# Altium PCB PCB1.PcbDoc (part 1 of 7)
Units mm, origin at the board's own origin, x right, y up, seen from the top; angles counter-clockwise.
Board outline 168 x 107.92 mm, 4 copper layers (Top Layer, POWER_LAYER, GND_LAYER, Bottom Layer), stack 1.182 mm thick; 507 components, 566 nets, 2495 pads, 1244 vias.
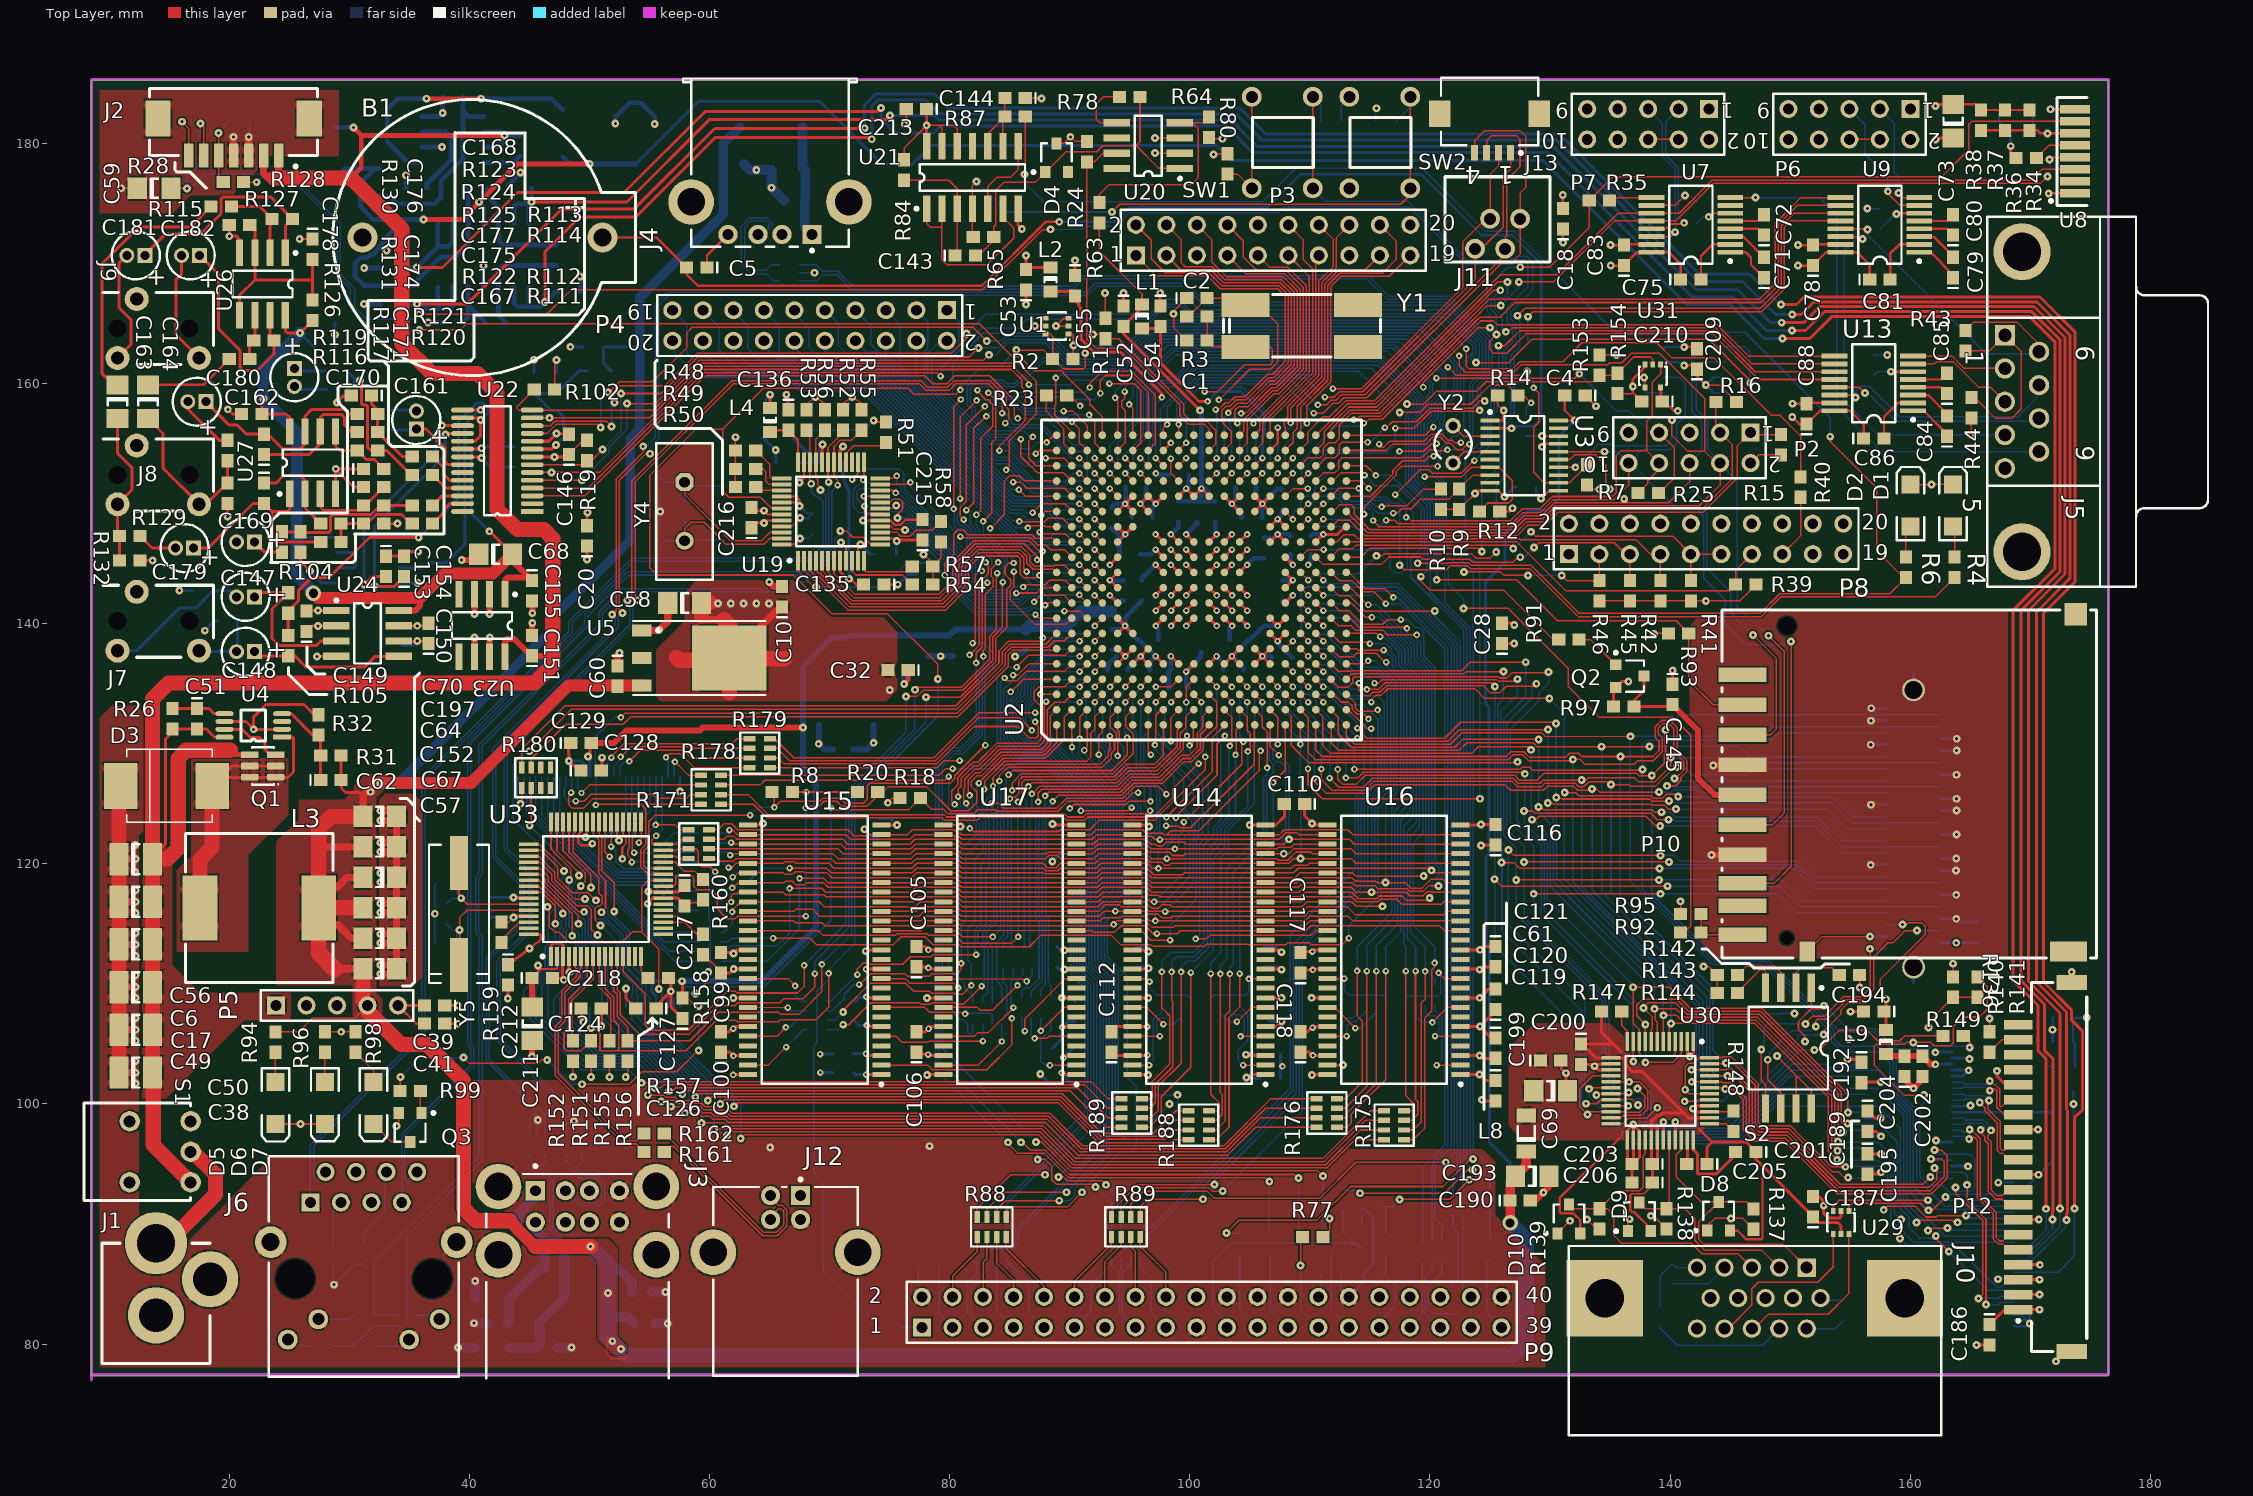
[diagram p0: Top Layer view]
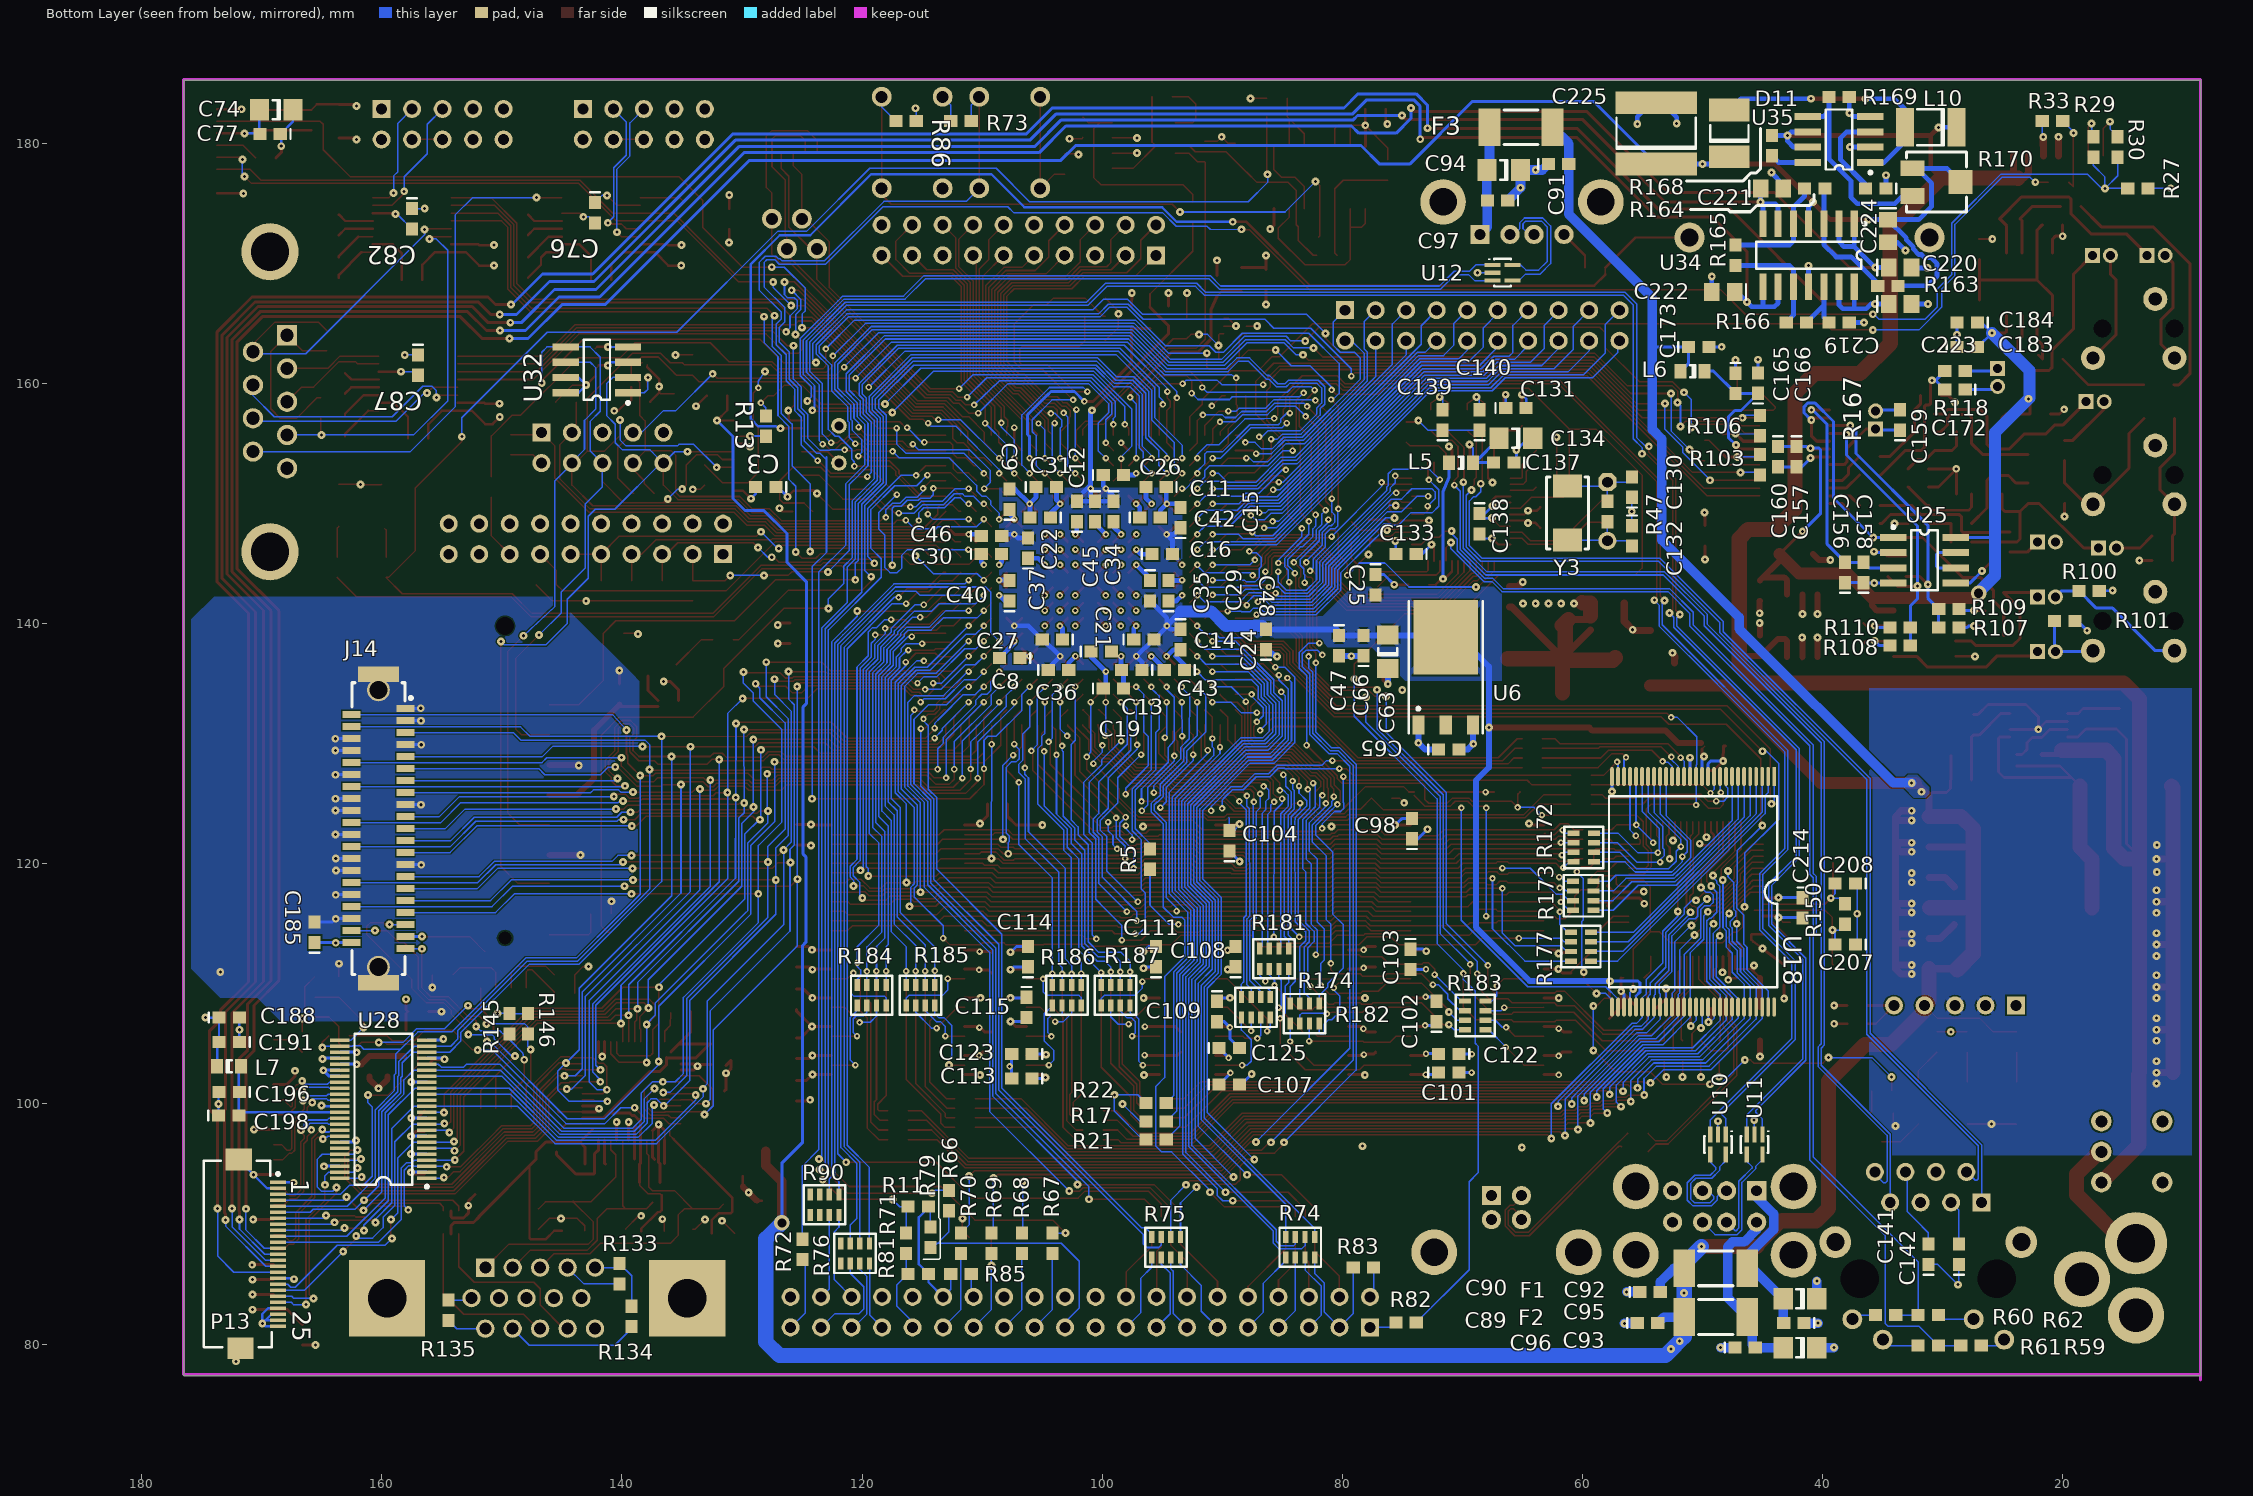
[diagram p1: Bottom Layer view, seen from below]
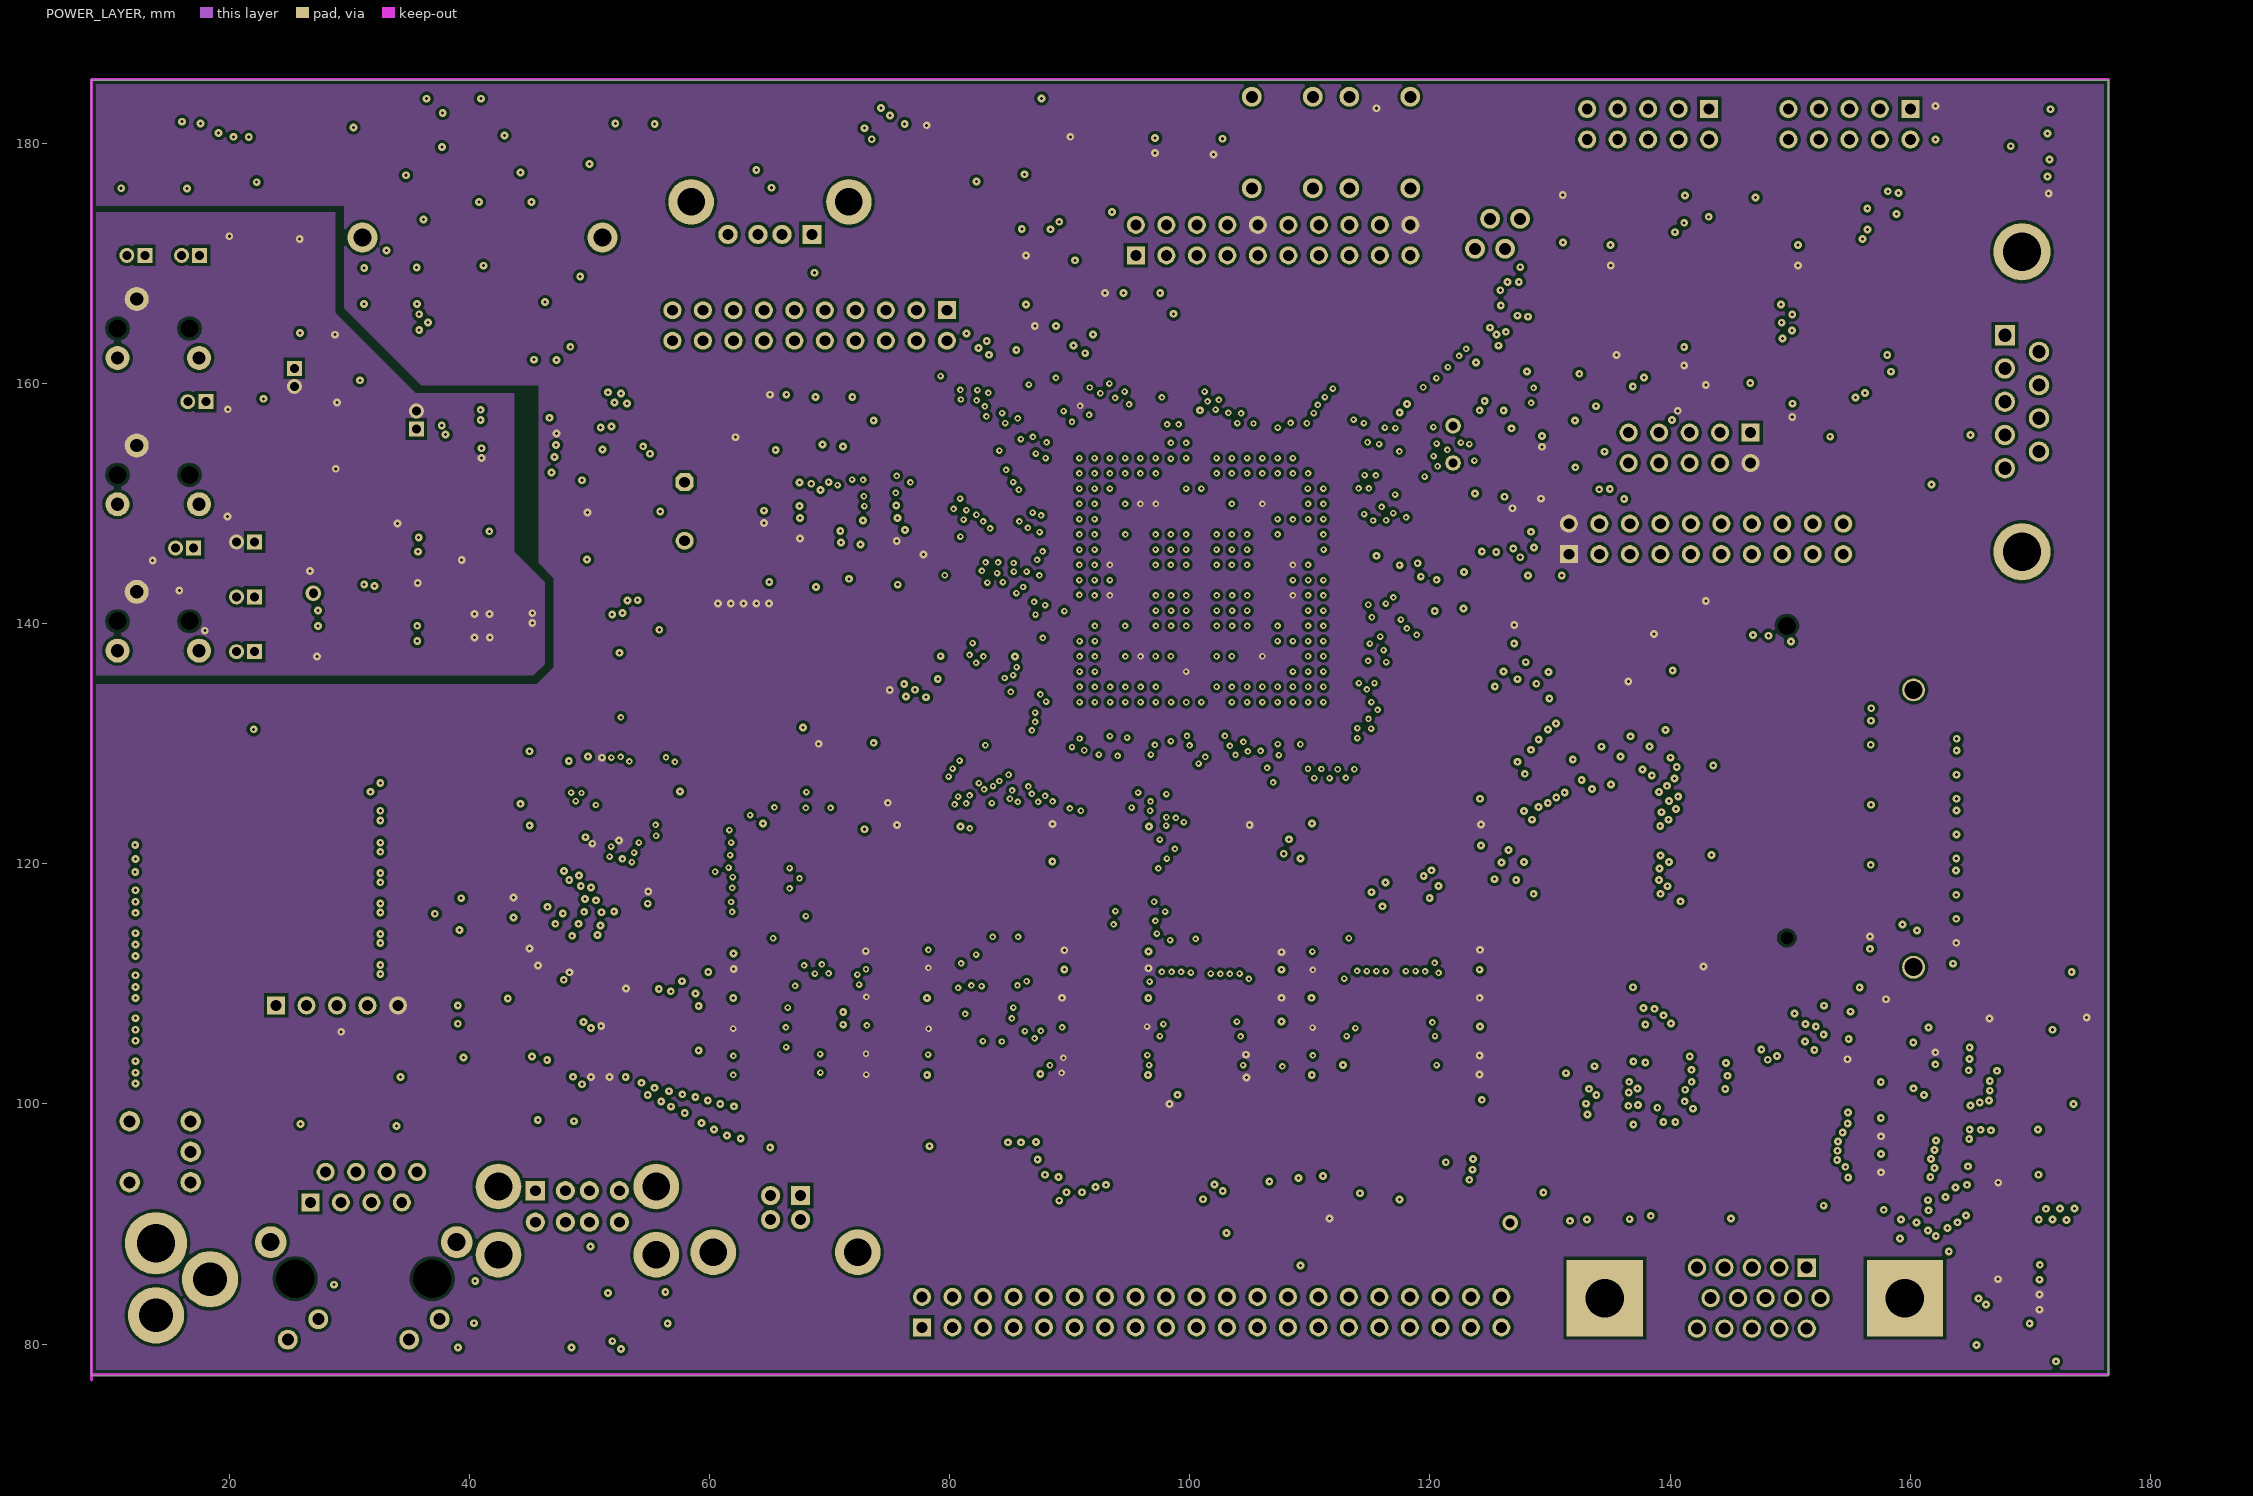
[diagram p2: POWER_LAYER]
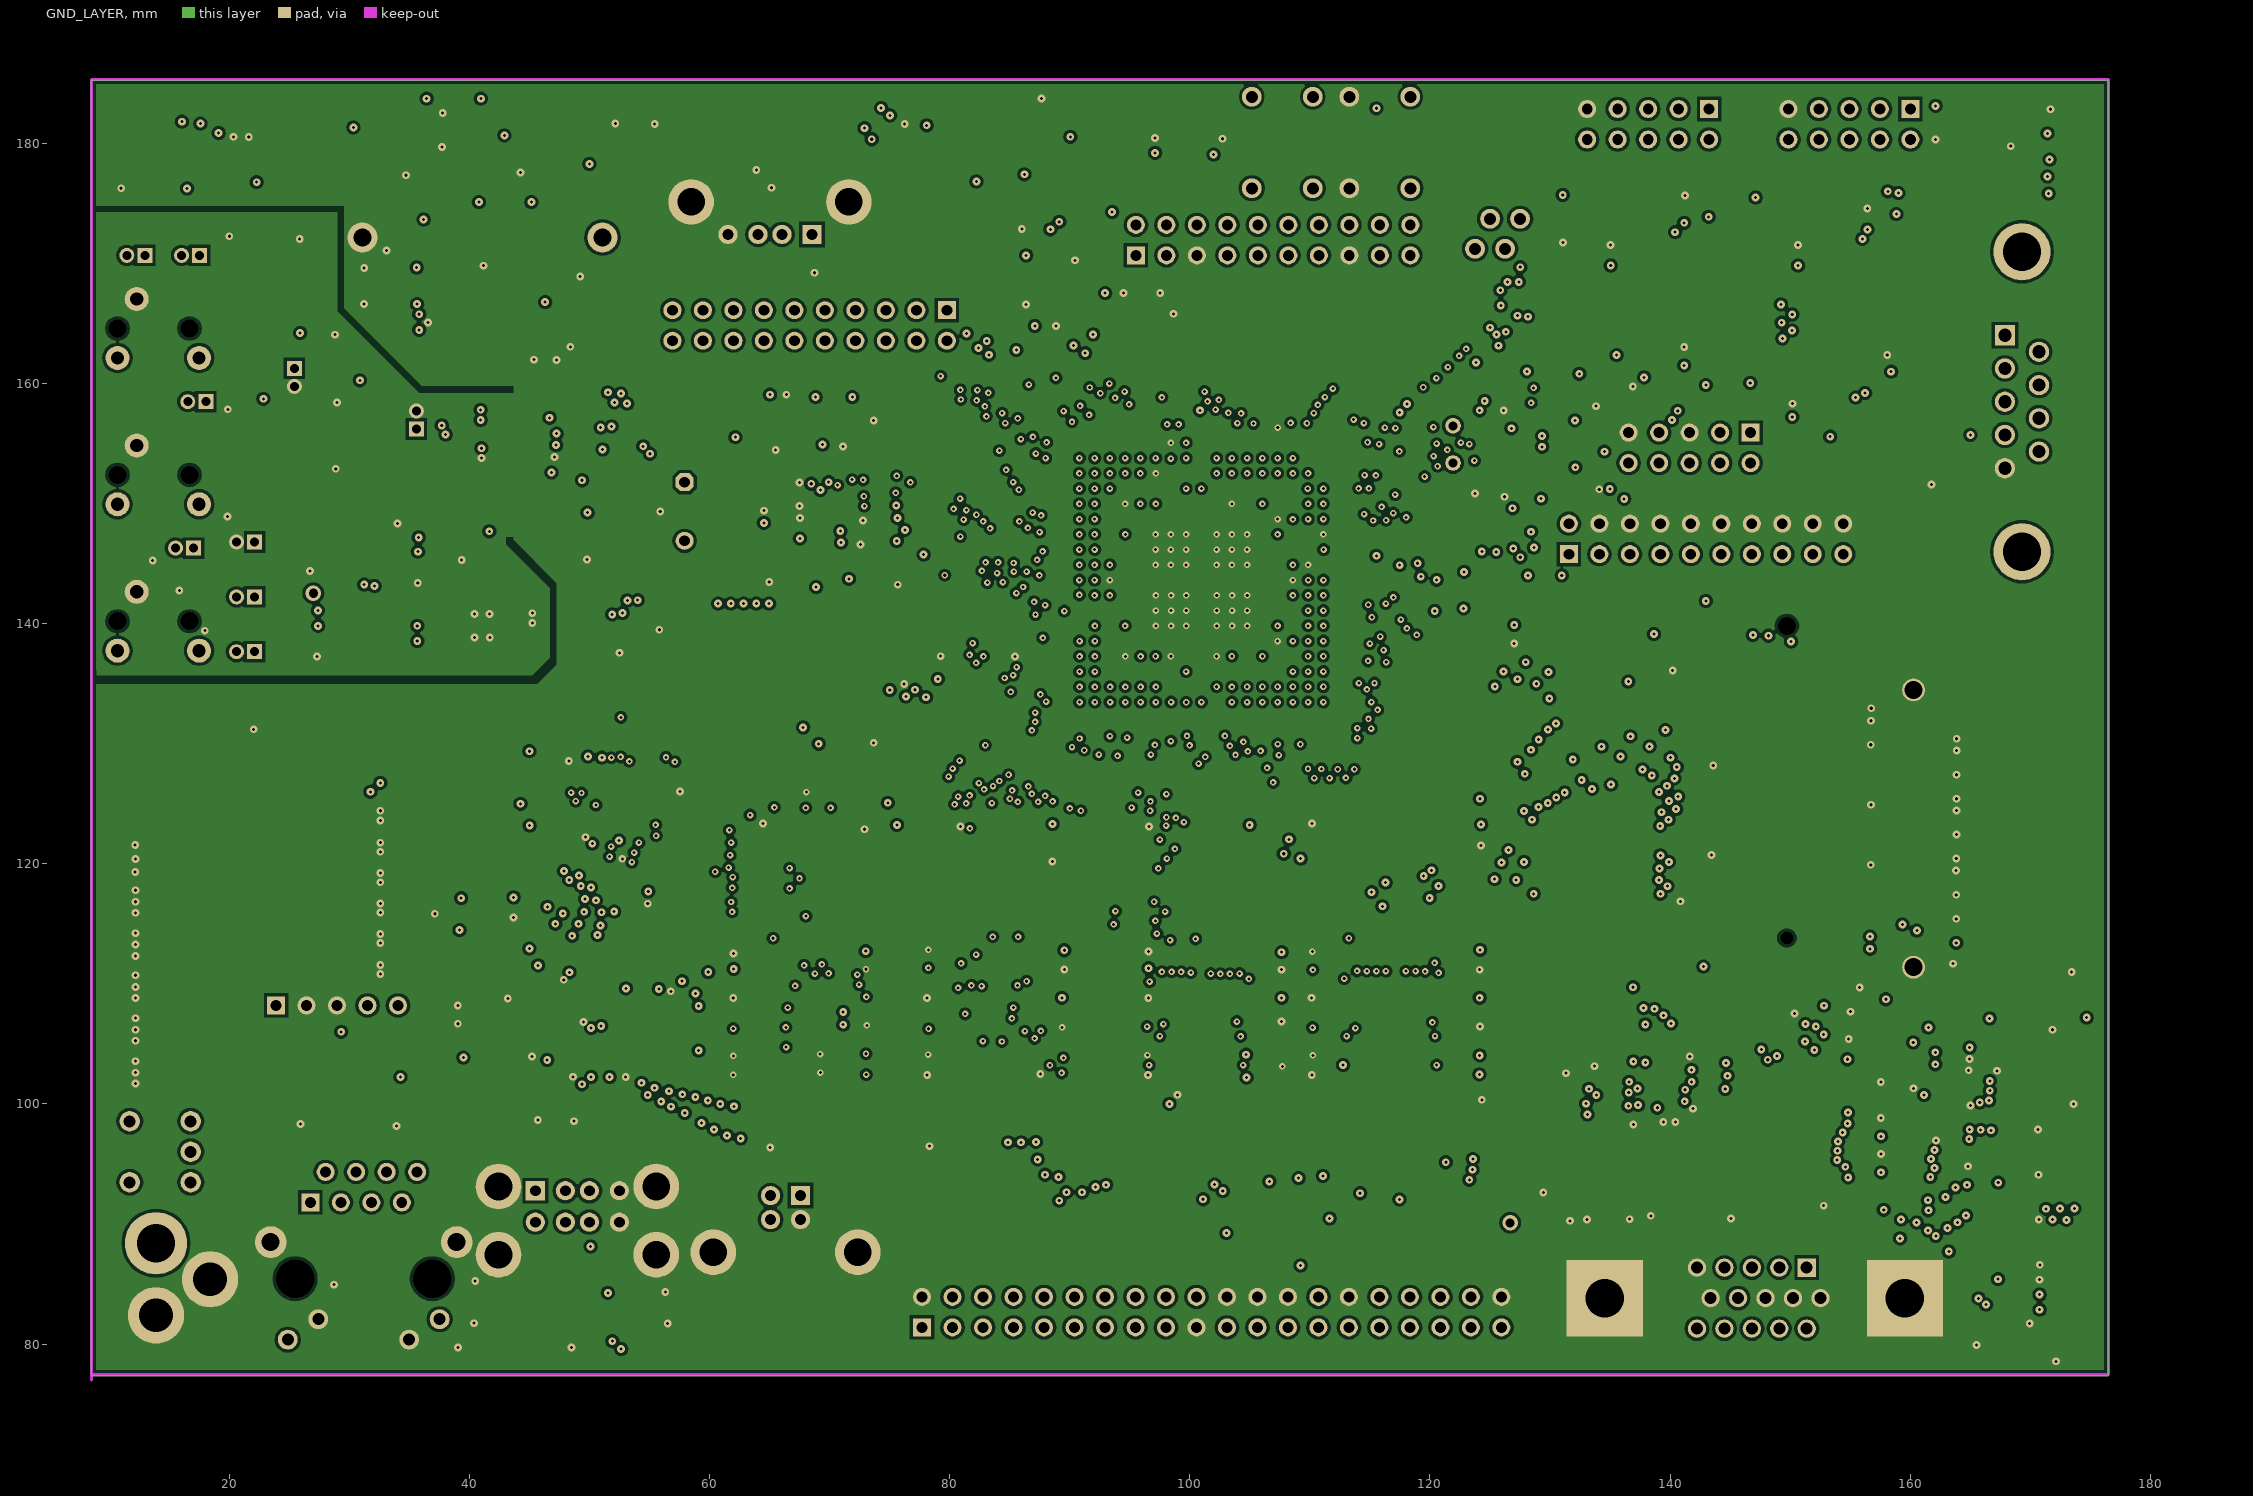
[diagram p3: GND_LAYER]

## Layer stack, top to bottom
Top Layer: signal copper 0.0356
Dielectric: core 0.4, FR-4, Dk 4.8
POWER_LAYER: signal copper 0.0356
Dielectric: prepreg 0.32, FR-4, Dk 4.8
GND_LAYER: signal copper 0.0356
Dielectric: core 0.32, FR-4, Dk 4.8
Bottom Layer: signal copper 0.0356

## Board outline
8.5,185.28 176.5,185.28 176.5,77.36 8.5,77.36

## Design rules (kind name [scope] priority, off if disabled: settings)
Clearance Clearance_POWER [OnLayer('POWER_LAYER')] p1: gap=0.254
Clearance Clearance_GND [OnLayer('GND_LAYER')] p2: gap=0.254
Clearance Clearance_BOTTOM [OnLayer('Bottom Layer')] p3: gap=0.127
Clearance Clearance_TOP [OnLayer('Top Layer')] p4: gap=0.127
ComponentClearance [All] p1: gap=0.254 collisioncheckmode=1 verticalgap=0.254
FanoutControl Fanout_BGA [IsBGA] p1: bgadir=Out bgaviamode=Centered fanoutstyle=BGA fanoutdirection=Alternating viagrid=0.025 // Fanout_BGA (Default Rule)
HoleSize [All] p1: absolutevalues=TRUE maxlimit=5.08 minlimit=0.254 maxpercent=80.000 minpercent=20.000
PlaneClearance [All] p1 off: clearance=0.254
PlaneConnect [All] p1 off: planeconnectstyle=Direct reliefexpansion=0.508 reliefentries=4 reliefconductorwidth=0.254 reliefairgap=0.254
PolygonConnect PolygonConnect_1 [All] p1 off: connectstyle=Relief reliefconductorwidth=0.4 reliefentries=4 polygonreliefangle="45 Angle"
PolygonConnect [InNet('GND') or InNet('VCCIO') or InNet('VCCCORE')] p2: connectstyle=Direct reliefconductorwidth=0.254 reliefentries=4 polygonreliefangle="45 Angle"
PolygonConnect PolygonConnect_top [OnLayer('Top Layer')] p3: connectstyle=Relief reliefconductorwidth=0.4 reliefentries=4 polygonreliefangle="45 Angle"
PolygonConnect PolygonConnect_GND [OnLayer('GND_LAYER')] p4: connectstyle=Direct reliefconductorwidth=0.254 reliefentries=4 polygonreliefangle="90 Angle"
PolygonConnect PolygonConnect_POWER [OnLayer('POWER_LAYER')] p5: connectstyle=Direct reliefconductorwidth=0.254 reliefentries=4 polygonreliefangle="90 Angle"
PolygonConnect PolygonConnect_bottom [OnLayer('Bottom Layer')] p6: connectstyle=Relief reliefconductorwidth=0.4 reliefentries=4 polygonreliefangle="45 Angle"
RoomDefinition Sheet1 [InComponentClass('Sheet1')] p1 off: confinementstyle=ConfineIn formatcopy=TRUE lockcomponents=FALSE outline 394.3,34.04 626.06,34.04 626.06,63.76 394.3,63.76
RoomDefinition Sheet2 [InComponentClass('Sheet2')] p2 off: confinementstyle=ConfineIn formatcopy=TRUE lockcomponents=FALSE outline 106.98,306.94 138.02,306.94 138.02,377.81 106.98,377.81
RoomDefinition Sheet3 [InComponentClass('Sheet3')] p3 off: confinementstyle=ConfineIn formatcopy=TRUE lockcomponents=FALSE outline 295.94,95.9 804.209,95.9 804.209,113.61 295.94,113.61
RoomDefinition Sheet4 [InComponentClass('Sheet4')] p4 off: confinementstyle=ConfineIn formatcopy=TRUE lockcomponents=FALSE outline 279.06,34.95 645.709,34.95 645.709,68.76 279.06,68.76
RoomDefinition Sheet5 [InComponentClass('Sheet5')] p5 off: confinementstyle=ConfineIn formatcopy=TRUE lockcomponents=FALSE outline 292.221,55.36 584.1,55.36 584.1,80.86 292.221,80.86
RoomDefinition Sheet6 [InComponentClass('Sheet6')] p6 off: confinementstyle=ConfineIn formatcopy=TRUE lockcomponents=FALSE outline 286.53,42.6 520.58,42.6 520.58,63.98 286.53,63.98
RoomDefinition Sheet7 [InComponentClass('Sheet7')] p7 off: confinementstyle=ConfineIn formatcopy=TRUE lockcomponents=FALSE outline 221.96,473.72 556.679,473.72 556.679,531.89 221.96,531.89
RoomDefinition Sheet8 [InComponentClass('Sheet8')] p8 off: confinementstyle=ConfineIn formatcopy=TRUE lockcomponents=FALSE outline 177.4,371.4 755.089,371.4 755.089,383.67 177.4,383.67
RoomDefinition Sheet9 [InComponentClass('Sheet9')] p9 off: confinementstyle=ConfineIn formatcopy=TRUE lockcomponents=FALSE outline 478.061,468.82 861.2,468.82 861.2,503.82 478.061,503.82
RoomDefinition Sheet10 [InComponentClass('Sheet10')] p10 off: confinementstyle=ConfineIn formatcopy=TRUE lockcomponents=FALSE outline 232.43,411.58 459.46,411.58 459.46,430.42 232.43,430.42
RoomDefinition Sheet11 [InComponentClass('Sheet11')] p11 off: confinementstyle=ConfineIn formatcopy=TRUE lockcomponents=FALSE outline 177.9,402.81 338.53,402.81 338.53,423.36 177.9,423.36
RoutingLayers [All] p1: top layer_v5=TRUE mid layer 1_v5=FALSE mid layer 2_v5=FALSE bottom layer_v5=TRUE
RoutingVias [All] p1: holewidth=0.254 width=0.65 viastyle="Through Hole" minholewidth=0.25 minwidth=0.54 maxholewidth=0.8 maxwidth=1.5
SolderMaskExpansion [All] p1: expansion=0.075
TestPointUsage [All] p1: valid=0 allowmultiple=FALSE
Testpoint [All] p1: side=15 testpointundercomponent=TRUE minsize=1.016 maxsize=2.54 preferedsize=1.524 minholesize=0 maxholesize=1.016 preferedholesize=0.813 testpointgrid=0.025 style=1023 order=0123456789
Width [All] p1: maxlimit=1.27 minlimit=0.12 preferedwidth=0.127 toplayer_minwidth=0.12 midlayer1_minwidth=0.2 midlayer1_prefwidth=0.25 midlayer2_minwidth=0.2 midlayer2_prefwidth=0.25 bottomlayer_minwidth=0.12 minimp=50.000000 maximp=50.000000 favimp=50.000000
12 further rules are at their usual default settings.

## Classes and differential pairs
component class Sheet1: B1 C1 C2 C3 C4 C5 D1 D2 R1 R2 R3 R4 R5 R6 R7 R8 R9 R10 R11 R12 R13 R14 R15 R16 R17 R18 R19 R20 R21 R22 R23 R24 R171 R172 R173 R177 R178 R179 R180 U1 U2 U3 Y1 Y2
component class Sheet2: P2 P3 P4 R25
component class Sheet3: C6 C8 C9 C10 C11 C12 C13 C14 C15 C16 C17 C18 C19 C20 C21 C22 C24 C25 C26 C27 C28 C29 C30 C31 C32 C34 C35 C36 C37 C38 C39 C40 C41 C42 C43 C45 C46 C47 C48 C49 C50 C51 C52 C53 C54 C55 C56 C57 C58 C59 C60 C61 C62 C63 C64 C65 C66 C67 C70 C152 C197 D3 J1 J2 L1 L2 L3 P5 Q1 R26 R27 R28 R29 R30 R31 R32 R33 S1 U4 U5 U6
component class Sheet4: C71 C72 C73 C74 C75 C76 C77 C78 C79 C80 C81 C82 C83 C84 C85 C86 C87 C88 C89 C90 C91 C92 C93 C94 C95 C96 C97 F1 F2 F3 J3 J4 J5 P6 P7 P8 R34 R35 R36 R37 R38 R39 R40 R41 R42 R43 R44 R45 R46 U7 U8 U9 U10 U11 U12 U13
component class Sheet5: C98 C99 C100 C101 C102 C103 C104 C105 C106 C107 C108 C109 C110 C111 C112 C113 C114 C115 C116 C117 C118 C119 C120 C121 C122 C123 C124 C125 C126 C127 C128 C129 R174 R181 R182 R183 R184 R185 R186 R187 U14 U15 U16 U17 U18
component class Sheet6: C130 C131 C132 C133 C134 C135 C136 C137 C138 C139 C140 C141 C142 J6 L4 L5 R47 R48 R49 R50 R51 R52 R53 R54 R55 R56 R57 R58 R59 R60 R61 R62 U19 Y3 Y4
component class Sheet7: C143 C144 C145 D4 D5 D6 D7 P9 P10 Q2 Q3 R63 R64 R65 R66 R67 R68 R69 R70 R71 R72 R73 R74 R75 R76 R77 R78 R79 R80 R81 R82 R83 R84 R85 R86 R87 R88 R89 R90 R91 R92 R93 R94 R95 R96 R97 R98 R99 SW1 SW2 U20 U21
component class Sheet8: C68 C146 C147 C148 C149 C150 C151 C153 C154 C155 C156 C157 C158 C159 C160 C161 C162 C163 C164 C165 C166 C167 C168 C169 C170 C171 C172 C173 C174 C175 C176 C177 C178 C179 C180 C181 C182 C183 C184 J7 J8 J9 L6 R100 R101 R102 R103 R104 R105 R106 R107 R108 R109 R110 R111 R112 R113 R114 R115 R116 R117 R118 R119 R120 R121 R122 R123 R124 R125 R126 R127 R128 R129 R130 R131 R132 U22 U23 U24 U25 U26 U27
component class Sheet9: C69 C185 C186 C187 C188 C189 C190 C191 C192 C193 C194 C195 C196 C198 C199 C200 C201 C202 C203 C204 C205 C206 D8 D9 D10 J10 J11 J14 L7 L8 L9 P12 R133 R134 R135 R136 R137 R138 R139 R140 R141 R142 R143 R144 R145 R146 R147 R148 R149 S2 U28 U29 U30
component class Sheet10: C207 C208 C209 C210 C211 C212 C213 C214 C215 C216 C217 C218 J12 R150 R151 R152 R153 R154 R155 R156 R157 R158 R159 R160 R161 R162 R175 R176 R188 R189 U31 U32 U33 Y5
component class Sheet11: C219 C220 C221 C222 C223 C224 C225 D11 J13 L10 P13 R163 R164 R165 R166 R167 R168 R169 R170 U34 U35

## Components (designator, comment, footprint, x,y, rotation, side; value= is the part's Value field where it differs from the comment)
B1 "CR2032" CR2032 36.068,169.672 r0 top
C1 "33pF" 0603 100.584,163.576 r0 top
C2 "33pF" 0603 100.584,167.132 r0 top
C3 "0.1" 0603 128.016,151.384 r0 bottom
C4 "0.1" 0603 132.08,159.004 r180 top
C5 "NP" 0603 58.928,169.672 r180 top
C6 "10uF 25V" 1210 12.192,116.84 r0 top
C8 "0.1" 0603 107.696,137.16 r0 bottom
C9 "0.1" 0603 107.696,150.368 r90 bottom
C10 "0.1" 0603 66.04,142.24 r90 top
C11 "0.1" 0603 95.504,151.384 r0 bottom
C12 "0.1" 0603 102.108,149.352 r90 bottom
C13 "0.1" 0603 97.536,136.144 r0 bottom
C14 "0.1" 0603 96.52,138.684 r180 bottom
C15 "0.1" 0603 93.472,148.844 r90 bottom
C16 "0.1" 0603 94.996,145.796 r180 bottom
C17 "10uF 25V" 1210 12.192,113.284 r0 top
C18 "0.1" 0603 131.064,173.736 r90 top
C19 "0.1" 0603 99.06,134.62 r180 bottom
C20 "0.1" 0603 49.784,147.32 r90 top
C21 "0.1" 0603 100.076,137.668 r180 bottom
C22 "0.1" 0603 105.156,148.844 r0 bottom
C24 "0.1" 0603 93.472,138.684 r270 bottom
C25 "0.1" 0603 77.216,143.256 r270 bottom
C26 "0.1" 0603 99.06,152.4 r180 bottom
C27 "0.1" 0603 104.14,138.684 r0 bottom
C28 "0.1" 0603 125.984,139.192 r90 top
C29 "0.1" 0603 94.488,142.748 r90 bottom
C30 "0.1" 0603 109.22,145.796 r180 bottom
C31 "0.1" 0603 104.648,151.384 r180 bottom
C32 "0.1" 0603 75.692,136.144 r180 top
C34 "0.1" 0603 99.06,149.352 r270 bottom
C35 "0.1" 0603 96.012,142.748 r270 bottom
C36 "0.1" 0603 103.632,136.144 r180 bottom
C37 "0.1" 0603 106.172,146.304 r90 bottom
C38 "10uF 25V" 1210 12.192,102.616 r0 top
C39 "0.1" 0603 37.084,108.204 r180 top
C40 "0.1" 0603 107.696,142.748 r90 bottom
C41 "0.1" 0603 37.084,106.68 r180 top
C42 "0.1" 0603 96.012,148.844 r180 bottom
C43 "0.1" 0603 93.98,136.144 r0 bottom
C45 "0.1" 0603 100.584,149.352 r270 bottom
C46 "0.1" 0603 109.22,147.32 r180 bottom
C47 "0.1" 0603 80.264,138.176 r270 bottom
C48 "0.1" 0603 86.36,138.684 r90 bottom
C49 "10uF 25V" 1210 12.192,109.728 r0 top
C50 "GRM32RR71H105K" 1210 12.192,106.172 r0 top
C51 "0.01" 0603 17.272,132.08 r270 top
C52 "0.1" 0603 94.488,165.608 r270 top
C53 "0.1" 0603 86.36,168.656 r90 top
C54 "0.1" 0603 97.536,165.608 r270 top
C55 "0.1" 0603 90.424,168.148 r270 top
C56 "10uF 25V" 1210 12.192,120.396 r0 top
C57 "10uF" 1206 32.512,111.252 r180 top
C58 "10uF" 1206 57.912,141.732 r0 top
C59 "10uF" 1206 13.716,176.276 r0 top
C60 "0.1" 0603 52.324,135.636 r270 top
C61 "0.1" 0603 125.476,108.712 r90 top
C62 "6800" 0603 28.448,127 r0 top
C63 "10uF" 1206 76.2,137.668 r90 bottom
C64 "10uF" 1206 32.512,118.872 r180 top
C65 "0.1" 0603 71.12,129.54 r180 bottom
C66 "0.1" 0603 78.232,138.176 r90 bottom
C67 "10uF" 1206 32.512,113.792 r180 top
C68 "10uF" 1206 42.164,145.796 r0 top
C69 "10uF" 1206 130.048,101.092 r180 top
C70 "10uF" 1206 32.512,123.952 r180 top
C71 "0.1" 0603 147.828,169.672 r90 top
C72 "0.1" 0603 147.828,173.228 r90 top
C73 "10uF" 1206 163.576,181.864 r90 top
C74 "10uF" 1206 168.804,182.812 r0 bottom
C75 "0.1" 0603 141.732,168.656 r0 top
C76 "0.1" 0603 142.24,174.244 r270 bottom
C77 "0.1" 0603 169.312,180.78 r0 bottom
C78 "0.1" 0603 151.892,170.688 r90 top
C79 "0.1" 0603 163.576,169.672 r90 top
C80 "0.1" 0603 163.576,173.228 r90 top
C81 "0.1" 0603 157.48,168.656 r0 top
C82 "0.1" 0603 157.48,173.736 r270 bottom
C83 "0.1" 0603 136.144,170.688 r90 top
C84 "0.1" 0603 163.068,156.464 r90 top
C85 "0.1" 0603 163.068,160.02 r90 top
C86 "0.1" 0603 156.972,155.448 r0 top
C87 "0.1" 0603 156.972,161.544 r270 bottom
C88 "0.1" 0603 151.384,157.48 r90 top
C89 "0.1" 0603 54.564,81.732 r180 bottom
C90 "0.1" 0603 54.356,84.328 r180 bottom
C91 "0.1" 0603 61.976,178.308 r180 bottom
C92 "10uF" 1206 41.864,83.764 r0 bottom
C93 "10uF" 1206 41.864,79.7 r0 bottom
C94 "10uF" 1206 66.548,177.8 r0 bottom
C95 "0.1" 0603 42.372,81.732 r0 bottom
C96 "0.1" 0603 46.436,79.7 r180 bottom
C97 "0.1" 0603 67.056,175.26 r0 bottom
C98 "0.1" 0603 74.168,122.936 r90 bottom
C99 "0.1" 0603 60.96,111.76 r90 top
C100 "0.1" 0603 60.96,105.156 r90 top
C101 "0.1" 0603 71.12,102.616 r180 bottom
C102 "0.1" 0603 72.136,107.696 r90 bottom
C103 "0.1" 0603 74.302,112.04 r270 bottom
C104 "0.1" 0603 89.408,121.92 r90 bottom
C105 "0.1" 0603 77.216,112.268 r90 top
C106 "0.1" 0603 77.216,105.156 r90 top
C107 "0.1" 0603 89.408,101.6 r180 bottom
C108 "0.1" 0603 88.9,112.268 r90 bottom
C109 "0.1" 0603 90.424,107.696 r270 bottom
C110 "0.1" 0603 108.712,124.968 r180 top
C111 "0.1" 0603 95.504,112.268 r90 bottom
C112 "0.1" 0603 93.472,105.156 r90 top
C113 "0.1" 0603 106.68,102.108 r0 bottom
C114 "0.1" 0603 106.172,112.268 r90 bottom
C115 "0.1" 0603 106.306,108.04 r270 bottom
C116 "0.1" 0603 125.476,122.428 r90 top
C117 "0.1" 0603 109.22,111.76 r90 top
C118 "0.1" 0603 109.22,105.156 r90 top
C119 "0.1" 0603 125.476,101.092 r270 top
C120 "0.1" 0603 125.476,104.648 r270 top
C121 "0.1" 0603 125.476,112.268 r270 top
C122 "0.1" 0603 71.12,104.14 r0 bottom
C123 "0.1" 0603 106.68,104.14 r0 bottom
C124 "0.1" 0603 50.122,107.969 r0 top
C125 "0.1" 0603 89.408,104.648 r180 bottom
C126 "0.1" 0603 54.694,107.969 r180 top
C127 "0.1" 0603 57.742,107.969 r90 top
C128 "0.1" 0603 50.122,127.781 r0 top
C129 "0.1" 0603 49.276,130.048 r0 top
C130 "33pF" 0603 55.88,151.384 r90 bottom
C131 "0.1" 0603 65.532,157.988 r180 bottom
C132 "33pF" 0603 55.88,147.32 r270 bottom
C133 "0.1" 0603 74.676,145.796 r0 bottom
C134 "10uF" 1206 65.532,155.448 r0 bottom
C135 "0.1" 0603 73.66,143.256 r180 top
C136 "0.1" 0603 66.548,156.972 r270 top
C137 "0.1" 0603 66.548,153.416 r0 bottom
C138 "0.1" 0603 68.58,148.336 r270 bottom
C139 "0.1" 0603 71.628,156.972 r90 bottom
C140 "0.1" 0603 68.58,156.972 r90 bottom
C141 "0.1" 0603 31.18,87.476 r90 bottom
C142 "NP" 0603 28.64,87.476 r90 bottom
C143 "0.1" 0603 81.28,170.688 r0 top
C144 "0.01" 0603 85.444,183.776 r180 top
C145 "1.0" 0603 140.208,134.112 r270 top
C146 "0.1" 0603 48.26,154.94 r90 top
C147 "10uF" CAPPR1.5-4x5 21.336,142.24 r180 top
C148 "10uF" CAPPR1.5-4x5 21.336,137.668 r180 top
C149 "470pF" 0603 26.416,140.208 r90 top
C150 "470pF" 0603 36.576,139.192 r90 top
C151 "0.1" 0603 45.212,138.176 r90 top
C152 "10uF" 1206 32.512,116.332 r180 top
C153 "2700pF" 0603 33.02,144.78 r270 top
C154 "2700pF" 0603 34.544,144.78 r90 top
C155 "0.1" 0603 45.212,142.748 r270 top
C156 "1.0" 0603 38.1,144.272 r90 bottom
C157 "0.1" 0603 42.164,153.924 r270 bottom
C158 "0.1" 0603 36.576,144.272 r90 bottom
C159 "0.1" 0603 33.528,156.972 r90 bottom
C160 "0.1" 0603 43.688,153.924 r270 bottom
C161 "47uF" CAPPR1.5-4x5 35.56,156.972 r90 top
C162 "0.1" 0603 21.844,157.48 r180 top
C163 "10uF" 1206 10.668,158.496 r270 top
C164 "10uF" 1206 13.208,158.496 r270 top
C165 "1.0" 0603 47.244,160.02 r270 bottom
C166 "0.1" 0603 45.364,160.044 r90 bottom
C167 "2200pF" 0603 32.004,148.336 r0 top
C168 "2200pF" 0603 30.988,159.004 r180 top
C169 "22uF" CAPPR1.5-4x5 21.336,146.812 r180 top
C170 "22uF" CAPPR1.5-4x5 25.4,160.528 r270 top
C171 "6800pF" 0603 25.908,146.812 r90 top
C172 "6800pF" 0603 28.956,159.512 r0 bottom
C173 "0.1" 0603 50.292,163.068 r180 bottom
C174 "470pF" 0603 22.86,150.876 r270 top
C175 "1500pF" 0603 32.004,151.384 r0 top
C176 "470pF" 0603 22.86,154.94 r90 top
C177 "1500pF" 0603 32.004,152.908 r0 top
C178 "1.0" 0603 26.924,171.196 r270 top
C179 "22uF" CAPPR1.5-4x5 16.256,146.304 r180 top
C180 "22uF" CAPPR1.5-4x5 17.272,158.496 r180 top
C181 "100uF" CAPPR1.5-4x5 12.192,170.688 r180 top
C182 "100uF" CAPPR1.5-4x5 16.764,170.688 r180 top
C183 "1.0" 0603 27.94,163.068 r180 bottom
C184 "0.1" 0603 27.94,165.1 r0 bottom
C185 "0.1" 0603 165.608,114.3 r90 bottom
C186 "0.1" 0603 166.624,80.772 r270 top
C187 "0.1" 0603 151.892,91.44 r90 top
C188 "0.1" 0603 172.72,107.188 r180 bottom
C189 "0.01" 0603 156.464,98.552 r270 top
C190 "0.1" 0603 127.508,91.948 r0 top
C191 "0.01" 0603 172.72,105.156 r0 bottom
C192 "0.1" 0603 155.956,102.616 r270 top
C193 "10uF" 1206 128.524,93.98 r180 top
C194 "0.1" 0603 156.972,107.696 r180 top
C195 "0.01" 0603 156.464,94.996 r270 top
C196 "0.1" 0603 172.718,100.984 r0 bottom
C197 "10uF" 1206 32.512,121.412 r180 top
C198 "0.01" 0603 172.76,99.048 r180 bottom
C199 "0.1" 0603 130.048,103.632 r0 top
C200 "0.1" 0603 132.588,104.14 r270 top
C201 "0.1" 0603 146.304,96.012 r180 top
C202 "0.1" 0603 161.036,103.124 r270 top
C203 "0.1" 0603 137.668,94.996 r180 top
C204 "0.01" 0603 159.512,103.124 r90 top
C205 "0.1" 0603 142.24,94.996 r180 top
C206 "0.1" 0603 137.668,93.472 r180 top
C207 "33pF" 0603 38.1,113.284 r0 bottom
C208 "33pF" 0603 38.1,118.364 r0 bottom
C209 "0.1" 0603 142.24,162.052 r90 top
C210 "0.1" 0603 138.5,158.496 r180 top
C211 "10uF" 1206 45.212,106.68 r90 top
C212 "0.1" 0603 43.18,110.744 r270 top
C213 "0.1" 0603 77.216,182.88 r180 top
C214 "0.1" 0603 41.656,116.332 r270 bottom
C215 "0.1" 0603 77.724,147.828 r90 top
C216 "0.1" 0603 63.5,148.844 r90 top
C217 "0.1" 0603 57.912,117.348 r270 top
C218 "0.1" 0603 46.058,110.509 r0 top
C219 "Cap Pol3" CC2012-0805 34.544,172.72 r270 bottom
C220 "Cap Pol3" CC2012-0805 33.528,169.672 r180 bottom
C221 "Cap Pol3" CC2012-0805 44.196,176.276 r180 bottom
C222 "Cap Pol3" CC2012-0805 48.26,167.64 r0 bottom
C223 "Cap Pol3" CC2012-0805 33.528,166.624 r180 bottom
C224 "Cap Semi" CC1608-0603 35.56,176.276 r0 bottom
C225 "Cap Pol3" CC5664-2225 53.848,180.848 r90 bottom
D1 "GREEN" DSO-F2/D6.1 163.576,149.86 r90 top
D2 "RED" DSO-F2/D6.1 160.02,149.86 r90 top
D3 "30BQ040" "DIODE SMC" 14.732,126.492 r0 top
D4 "BAS16" SOT23 88.9,178.816 r0 top
D5 "GREEN" DSO-F2/D6.1 23.828,100.072 r270 top
D6 "GREEN" DSO-F2/D6.1 27.94,100.076 r270 top
D7 "GREEN" DSO-F2/D6.1 32.004,100.076 r270 top
D8 "BAV99LT1" SOT23 144.052,90.636 r0 top
D9 "BAV99LT1" SOT23 137.436,90.6 r0 top
D10 "BAV99LT1" SOT23 131.572,90.424 r0 top
D11 "10MQ100N" CD4532-1812 47.752,180.848 r270 bottom
F1 "miniSMDC050" miniSMDC050 51.516,86.304 r180 bottom
F2 "miniSMDC050" miniSMDC050 51.516,82.24 r180 bottom
F3 "miniSMDC050" miniSMDC050 62.484,181.356 r0 bottom
J1 "DJK-02B" DJK-02A 23.876,88.392 r0 top
J2 "53261-0790" 53261-07 19.092,180.988 r180 top
J3 "1-1470168-1" 1470168 48.976,77.16 r270 top
J4 "787616-1" 787616 65.024,185.42 r90 top
J5 "D Connector 9" DSUB1.385-2H9 178.816,158.496 r270 top
J6 "LU1T516-43" LU1T516-43 31.18,85.444 r0 top
J7 "ST021" ST023 13.208,142.748 r90 top
J8 "ST021" ST023 13.208,154.94 r90 top
J9 "ST021" ST023 13.208,167.132 r90 top
J10 "DA15F" DA15F 148.844,81.28 r0 top
J11 "KCA-K4R" KCAK4R 127.508,173.736 r180 top
J12 "787780-1" 787780 66.32,91.36 r270 top
J13 "CL586-0537-0" FH12-10(4)SA-1SH 124.968,180.848 r180 top
J14 "DF9-41S-1V" DF9-41S-1V 160.286,122.936 r90 bottom
L1 "CM201212-R47KL" INDC2012-0805 96.012,165.608 r270 top
L2 "CM201212-R47KL" INDC2012-0805 88.392,168.656 r270 top
L3 "CDRH127-220" CDRH127 27.432,116.332 r270 top
L4 "CM201212-R47KL" INDC2012-0805 65.024,156.972 r90 top
L5 "CM201212-R47KL" INDC2012-0805 70.104,153.416 r0 bottom
L6 "CM201212-R47KL" INDC2012-0805 50.8,161.036 r0 bottom
L7 "CM201212-R47KL" INDC2012-0805 172.72,103.124 r180 bottom
L8 "LQH31MN3R3K" INDC3216-1206 128.016,97.536 r90 top
L9 "CM201212-R47KL" INDC2012-0805 157.988,105.156 r270 top
L10 "Inductor" INDC4532-1812 30.988,181.356 r0 bottom
P2 "Header 5X2" HDR2X5 146.708,155.924 r180 top
P3 "Header 10X2" HDR2X10 95.504,170.688 r0 top
P4 "Header 10X2" HDR2X10 79.756,166.116 r180 top
P5 "Header 5" HDR1X5 23.876,108.204 r0 top
P6 "Header 5X2" HDR2X5 160.02,182.88 r180 top
P7 "Header 5X2" HDR2X5 143.256,182.88 r180 top
P8 "Header 10X2" HDR2X10 131.572,145.796 r0 top
P9 "Header 20X2" HDR2X20 77.688,81.384 r0 top
P10 "SCDA1A1501" SCDA_NO2 163.068,132.588 r270 top
P12 "FI-SE20P-HF" FI-SE20P-HF -758.087,877.36 r90 top
P13 "Conn_25_smt" Conn_25_smt 168.656,93.472 r270 bottom
Q1 "IRF5806" Micro6 21.844,127 r90 top
Q2 "IRLML5203" SOT-23 136.652,135.636 r270 top
Q3 "BC847C" SOT23 35.052,98.044 r180 top
R1 "1k" CR1608-0603 92.964,164.592 r90 top
R2 "NP" CR1608-0603 89.408,162.052 r180 top
R3 "1M" CR1608-0603 100.584,165.608 r0 top
R4 "562" CR1608-0603 163.716,144.708 r270 top
R5 "33" CR1608-0603 96.012,120.396 r270 bottom
R6 "562" CR1608-0603 159.652,144.708 r270 top
R7 "10k" CR1608-0603 133.096,152.4 r90 top
R8 "1k" CR1608-0603 66.04,125.984 r180 top
R9 "1k" CR1608-0603 122.428,150.368 r90 top
R10 "1k" CR1608-0603 120.904,150.368 r90 top
R11 "1k" CR1608-0603 115.316,91.44 r0 bottom
R12 "10k" CR1608-0603 124.968,149.352 r180 top
R13 "1k" CR1608-0603 128.016,156.464 r90 bottom
R14 "1.1k" CR1608-0603 126.492,159.004 r0 top
R15 "10k" CR1608-0603 149.248,154.908 r270 top
R16 "10k" CR1608-0603 144.676,158.464 r0 top
R17 "10k" CR1608-0603 95.504,98.552 r0 bottom
R18 "10k" CR1608-0603 76.708,125.476 r180 top
R19 "2.2k" CR1608-0603 49.784,154.432 r90 top
R20 "2.2k" CR1608-0603 73.152,125.984 r180 top
R21 "2.2k" CR1608-0603 95.504,97.028 r0 bottom
R22 "2.2k" CR1608-0603 95.504,100.076 r0 bottom
R23 "1k" CR1608-0603 88.9,159.004 r180 top
R24 "1k" CR1608-0603 91.44,179.324 r90 top
R25 "NP" CR1608-0603 138.176,150.876 r0 top
R26 "47k" CR1608-0603 15.24,132.08 r90 top
R27 "15k" CR1608-0603 13.716,176.276 r180 bottom
R28 "0" CR1608-0603 20.32,176.784 r0 top
R29 "0" CR1608-0603 17.432,179.712 r270 bottom
R30 "8.2k" CR1608-0603 15.4,179.712 r270 bottom
R31 "3.6k" CR1608-0603 28.448,129.032 r180 top
R32 "1.1k" CR1608-0603 27.432,131.572 r90 top
R33 "0" CR1608-0603 20.828,181.864 r0 bottom
R34 "1k" CR1608-0603 169.672,178.816 r180 top
R35 "NP" CR1608-0603 134.112,175.26 r180 top
R36 "33" CR1608-0603 169.952,181.944 r90 top
R37 "33" CR1608-0603 167.92,181.944 r90 top
R38 "33" CR1608-0603 165.888,181.944 r90 top
R39 "10k" CR1608-0603 146.304,143.256 r0 top
R40 "0" CR1608-0603 150.876,151.384 r90 top
R41 "10k" CR1608-0603 141.732,142.748 r270 top
R42 "10k" CR1608-0603 139.192,142.748 r270 top
R43 "NP" CR1608-0603 164.592,163.576 r90 top
R44 "NP" CR1608-0603 165.1,157.988 r270 top
R45 "10k" CR1608-0603 136.652,142.748 r270 top
R46 "10k" CR1608-0603 134.112,142.748 r270 top
R47 "NP" CR1608-0603 57.912,149.352 r90 bottom
R48 "2.2k" CR1608-0603 62.992,154.432 r0 top
R49 "2.2k" CR1608-0603 62.992,152.908 r0 top
R50 "2.2k" CR1608-0603 62.992,151.384 r0 top
R51 "5.9k" CR1608-0603 74.676,155.956 r90 top
R52 "49.9" CR1608-0603 71.12,156.972 r270 top
R53 "49.9" CR1608-0603 68.072,156.972 r90 top
R54 "5.1k" CR1608-0603 77.724,143.256 r0 top
R55 "49.9" CR1608-0603 72.644,156.972 r270 top
R56 "49.9" CR1608-0603 69.596,156.972 r90 top
R57 "5.1k" CR1608-0603 77.724,144.78 r0 top
R58 "5.1k" CR1608-0603 79.248,147.662 r270 top
R59 "510" CR1608-0603 27.624,79.856 r180 bottom
R60 "510" CR1608-0603 34.736,82.396 r0 bottom
R61 "5.1k" CR1608-0603 31.18,79.856 r0 bottom
R62 "5.1k" CR1608-0603 31.18,82.396 r180 bottom
R63 "3.6k" CR1608-0603 92.456,174.244 r270 top
R64 "10k" CR1608-0603 101.6,181.356 r90 top
R65 "NP" CR1608-0603 82.804,172.212 r0 top
R66 "82" CR1608-0603 112.776,91.948 r270 bottom
R67 "22" CR1608-0603 104.14,88.392 r270 bottom
R68 "22" CR1608-0603 106.68,88.392 r270 bottom
R69 "82" CR1608-0603 109.22,88.392 r270 bottom
R70 "22" CR1608-0603 111.76,88.392 r270 bottom
R71 "82" CR1608-0603 116.332,88.392 r270 bottom
R72 "82" CR1608-0603 124.968,87.884 r270 bottom
R73 "10k" CR1608-0603 111.76,181.864 r180 bottom
R74 "CAY16-330J4" CAY16-J4 82.296,88.9 r270 bottom
R75 "CAY16-330J4" CAY16-J4 93.472,88.9 r270 bottom
R76 "CAY16-330J4" CAY16-J4 119.38,88.392 r270 bottom
R77 "1k" CR1608-0603 110.236,88.9 r0 top
R78 "1k" CR1608-0603 94.996,183.896 r0 top
R79 "5.6k" CR1608-0603 114.3,88.9 r270 bottom
R80 "1k" CR1608-0603 103.124,178.308 r90 top
R81 "8.2k" CR1608-0603 115.316,85.852 r0 bottom
R82 "82" CR1608-0603 74.676,81.788 r180 bottom
R83 "10k" CR1608-0603 78.232,86.36 r180 bottom
R84 "100k" CR1608-0603 76.2,177.8 r90 top
R85 "470" CR1608-0603 111.76,85.852 r180 bottom
R86 "10k" CR1608-0603 116.332,181.864 r180 bottom
R87 "220k" CR1608-0603 85.444,182.252 r0 top
R88 "CAY16-330J4" CAY16-J4 82.296,88.9 r90 top
R89 "CAY16-330J4" CAY16-J4 93.472,88.9 r90 top
R90 "CAY16-330J4" CAY16-J4 121.92,92.456 r270 bottom
R91 "100" CR1608-0603 131.572,138.684 r180 top
R92 "100" CR1608-0603 141.732,114.3 r180 top
R93 "10k" CR1608-0603 140.716,139.192 r0 top
R94 "2.2k" CR1608-0603 23.828,105.152 r90 top
R95 "100k" CR1608-0603 141.732,115.824 r0 top
R96 "1k" CR1608-0603 27.94,105.156 r90 top
R97 "NP" CR1608-0603 136.144,133.096 r180 top
R98 "910" CR1608-0603 30.48,105.156 r90 top
R99 "10k" CR1608-0603 35.052,101.092 r180 top
R100 "47k" CR1608-0603 17.78,142.748 r180 bottom
R101 "47k" CR1608-0603 19.812,140.208 r0 bottom
R102 "1k" CR1608-0603 46.228,159.512 r180 top
R103 "47k" CR1608-0603 45.212,153.252 r270 bottom
R104 "10k" CR1608-0603 24.892,141.732 r90 top
R105 "10k" CR1608-0603 24.892,138.176 r90 top
R106 "10k" CR1608-0603 45.212,156.502 r270 bottom
R107 "634" CR1608-0603 29.464,139.7 r180 bottom
R108 "634" CR1608-0603 33.528,138.176 r0 bottom
R109 "90.9" CR1608-0603 29.464,141.224 r180 bottom
R110 "90.9" CR1608-0603 33.528,139.7 r0 bottom
R111 "4.42k" CR1608-0603 36.068,148.336 r0 top
R112 "1.33k" CR1608-0603 36.068,149.86 r0 top
R113 "4.42k" CR1608-0603 36.068,153.924 r0 top
R114 "1.33k" CR1608-0603 36.068,152.4 r0 top
R115 "3.9k" CR1608-0603 19.304,174.752 r180 top
R116 "3.9k" CR1608-0603 20.828,162.052 r180 top
R117 "1.5k" CR1608-0603 24.384,146.812 r90 top
R118 "1.5k" CR1608-0603 28.956,161.036 r0 bottom
R119 "3.9k" CR1608-0603 22.86,163.576 r0 top
R120 "4.99k" CR1608-0603 28.448,146.812 r0 top
R121 "2.32k" CR1608-0603 28.448,148.336 r0 top
R122 "715" CR1608-0603 32.004,149.86 r0 top
R123 "4.99k" CR1608-0603 31.496,157.48 r0 top
R124 "2.32k" CR1608-0603 31.496,155.956 r0 top
R125 "715" CR1608-0603 31.496,154.432 r0 top
R126 "100k" CR1608-0603 26.924,166.116 r90 top
R127 "100k" CR1608-0603 20.828,173.228 r0 top
R128 "3.9k" CR1608-0603 24.384,173.736 r180 top
R129 "562" CR1608-0603 11.684,147.32 r0 top
R130 "562" CR1608-0603 19.812,154.432 r90 top
R131 "47k" CR1608-0603 19.812,150.876 r90 top
R132 "47k" CR1608-0603 11.684,145.288 r180 top
R133 "10k" CR1608-0603 140.208,85.852 r270 bottom
R134 "10k" CR1608-0603 139.192,82.296 r270 bottom
R135 "10k" CR1608-0603 154.432,82.804 r270 bottom
R136 "NP" CR1608-0603 166.624,105.156 r90 top
R137 "75" CR1608-0603 146.956,90.404 r90 top
R138 "75" CR1608-0603 139.7,90.424 r90 top
R139 "75" CR1608-0603 134.112,90.424 r90 top
R140 "NP" CR1608-0603 163.576,109.728 r270 top
R141 "0" CR1608-0603 165.608,109.728 r270 top
R142 "1k" CR1608-0603 154.94,110.744 r180 top
R143 "1k" CR1608-0603 144.78,110.744 r180 top
R144 "1k" CR1608-0603 144.78,109.22 r180 top
R145 "10k" CR1608-0603 149.352,106.68 r270 bottom
R146 "10k" CR1608-0603 147.828,106.68 r270 bottom
R147 "10k" CR1608-0603 135.128,107.696 r0 top
R148 "422" CR1608-0603 145.288,98.552 r270 top
R149 "33" CR1608-0603 163.576,105.664 r180 top
R150 "NP" CR1608-0603 38.1,115.824 r270 bottom
R151 "1.5k" CR1608-0603 50.122,104.413 r90 top
R152 "12.1k" CR1608-0603 48.598,104.413 r270 top
R153 "10k" CR1608-0603 134.112,161.544 r90 top
R154 "NP" CR1608-0603 135.636,160.02 r90 top
R155 "10k" CR1608-0603 51.646,104.413 r90 top
R156 "10k" CR1608-0603 53.17,104.413 r270 top
R157 "10k" CR1608-0603 55.71,110.509 r0 top
R158 "10k" CR1608-0603 59.436,113.284 r270 top
R159 "10k" CR1608-0603 42.672,114.3 r90 top
R160 "10k" CR1608-0603 59.436,117.856 r90 top
R161 "0" CR1608-0603 55.372,96.012 r180 top
R162 "0" CR1608-0603 55.372,97.536 r180 top
R163 "Res3" CR1608-0603 34.544,168.148 r180 bottom
R164 "Res3" CR1608-0603 40.64,176.276 r180 bottom
R165 "Res3" CR1608-0603 47.244,170.688 r90 bottom
R166 "Res3" CR1608-0603 42.164,165.1 r0 bottom
R167 "Res3" CR1608-0603 38.608,165.1 r0 bottom
R168 "Res3" CR1608-0603 44.196,179.832 r270 bottom
R169 "Res3" CR1608-0603 38.608,183.896 r0 bottom
R170 "10k" POT4MM-2 30.48,176.784 r180 bottom
R171 "CAY16-510J4" CAY16-J4 59.944,120.44 r180 top
R172 "CAY16-510J4" CAY16-J4 60.74,122.56 r180 bottom
R173 "CAY16-510J4" CAY16-J4 60.76,118.54 r180 bottom
R174 "CAY16-510J4" CAY16-J4 88.392,107.188 r90 bottom
R175 "CAY16-510J4" CAY16-J4 117.856,97.028 r180 top
R176 "CAY16-510J4" CAY16-J4 112.268,98.044 r180 top
R177 "CAY16-510J4" CAY16-J4 60.96,114.3 r180 bottom
R178 "CAY16-510J4" CAY16-J4 60.96,124.968 r180 top
R179 "CAY16-510J4" CAY16-J4 65.024,128.016 r180 top
R180 "CAY16-510J4" CAY16-J4 46.736,128.016 r270 top
R181 "CAY16-510J4" CAY16-J4 86.868,111.252 r90 bottom
R182 "CAY16-510J4" CAY16-J4 84.328,106.68 r90 bottom
R183 "CAY16-510J4" CAY16-J4 68.072,106.172 r0 bottom
R184 "CAY16-510J4" CAY16-J4 120.396,108.204 r90 bottom
R185 "CAY16-510J4" CAY16-J4 116.332,108.204 r90 bottom
R186 "CAY16-510J4" CAY16-J4 104.14,108.204 r90 bottom
R187 "CAY16-510J4" CAY16-J4 100.076,108.204 r90 bottom
R188 "CAY16-510J4" CAY16-J4 101.6,97.028 r180 top
R189 "CAY16-510J4" CAY16-J4 96.012,98.044 r180 top
S1 "PST-71AR1" PST-71AR1 14.224,90.932 r270 top
S2 "SW DIP-4" SO-G8/D6.6 149.86,104.648 r180 top
SW1 "PBUT" SWBUTDIP4 110.236,183.896 r270 top
SW2 "PBUT" SWBUTDIP4 118.364,183.896 r270 top
U1 "NC7WZ16P6X" SC88 89.724,166.644 r90 top
U2 "EP9315-CBZ" BGA352x20 88.9,131.572 r90 top
U3 "DS1306E" TSSOP20 127.508,154.432 r270 top
U4 "LM3485" MSOP8 24.384,130.556 r180 top
U5 "IRU1030-33CD" "TO-252-2 (D-PAK)" 54.34,139.432 r270 top
U6 "IRU1117-18CD" "TO-252-2 (D-PAK)" 73.66,131.572 r180 bottom
U7 "MAX3232ECAE" SSOP16 141.732,173.228 r90 top
U8 "TFDU6102" TFDU_8PIN 173.736,180.848 r90 top
U9 "MAX3232ECAE" SSOP16 157.48,173.228 r90 top
U10 "USBDF01W5" SOT353 51.308,99.06 r0 bottom
U11 "USBDF01W5" SOT353 48.26,99.06 r0 bottom
U12 "USBDF01W5" SOT353 69.088,166.624 r270 bottom
U13 "MAX3232ECAE" SSOP16 156.972,160.02 r90 top
U14 "MT48LC32M8A2TG" TSSOP2(0.44m) 100.756,112.84 r90 top
U15 "MT48LC32M8A2TG" TSSOP2(0.44m) 68.752,112.84 r90 top
U16 "MT48LC32M8A2TG" TSSOP2(0.44m) 117.012,112.84 r90 top
U17 "MT48LC32M8A2TG" TSSOP2(0.44m) 85.008,112.84 r90 top
U18 "JS28F512P30" TSOP56 44.026,127.273 r270 bottom
U19 "RTL8201BL" F-QFP7x7-G48/X.3N 70.104,149.352 r90 top
U20 "DS1706TESA" SOIC8N 96.52,179.832 r90 top
U21 "MC74HC132AD" 751A-03 81.888,177.172 r0 top
U22 "CS4271" TSOP28 45.212,149.352 r180 top
U23 "LM78L05ACM" M08A 43.688,139.192 r180 top
U24 "MAX4477ASA" NSO8 31.496,139.192 r270 top
U25 "MAX4477ASA" NSO8 31.496,145.288 r270 bottom
U26 "LM4808M" M08A 25.4,167.64 r180 top
U27 "MAX4477ASA" NSO8 26.924,153.416 r0 top
U28 "SN75LVDS84" TSSO12x8-48 159.004,99.06 r90 bottom
U29 "NC7WZ16P6X" SC88 152.4,90.932 r180 top
U30 "ADV7123KST140" 48A 139.192,101.092 r270 top
U31 "NC7SZ32P5X" SC88A 134.112,161.544 r180 top
U32 "AT25F1024" M08A 142.748,158.496 r90 bottom
U33 "ISP1581BD" LQFP64 50.63,118.637 r90 top
U34 "LM324AD" 751A-02 41.148,170.688 r0 bottom
U35 "MC34063AD" 751-02 38.608,180.34 r90 bottom
Y1 "KX-MC 14.7456 Mhz" KX-MC 112.268,163.068 r0 top
Y2 "32.768k" BCY-W2/D3.1 121.92,154.94 r180 top
Y3 "KX-12B 25.000 Mhz" KX-12B 62.484,144.272 r270 bottom
Y4 "25.000Mhz" HC-49U 57.912,149.352 r270 top
Y5 "12.000M" CSM-7 39.116,115.824 r90 top

## Footprints (in the part's own frame and the unit in brackets; to place one, negate y for a bottom-side part, rotate by r counter-clockwise, add the part's x,y. Pads: shape width x height; smd on the part's side, far side on the other; paste and mask are expansions set on the pad)
48A [mm] "QFP; 48 Leads; Body 7 x 7 mm; Pitch 0.5 mm"
  rect 1.6x0.3 smd: 1(-4.1,2.75) 2(-4.1,2.25) 3(-4.1,1.75) 4(-4.1,1.25) 5(-4.1,0.75) 6(-4.1,0.25) 7(-4.1,-0.25) 8(-4.1,-0.75) 9(-4.1,-1.25) 10(-4.1,-1.75) 11(-4.1,-2.25) 12(-4.1,-2.75) 25(4.1,-2.75) 26(4.1,-2.25) 27(4.1,-1.75) 28(4.1,-1.25) 29(4.1,-0.75) 30(4.1,-0.25) 31(4.1,0.25) 32(4.1,0.75) 33(4.1,1.25) 34(4.1,1.75) 35(4.1,2.25) 36(4.1,2.75)
  rect 0.3x1.6 smd: 13(-2.75,-4.1) 14(-2.25,-4.1) 15(-1.75,-4.1) 16(-1.25,-4.1) 17(-0.75,-4.1) 18(-0.25,-4.1) 19(0.25,-4.1) 20(0.75,-4.1) 21(1.25,-4.1) 22(1.75,-4.1) 23(2.25,-4.1) 24(2.75,-4.1) 37(2.75,4.1) 38(2.25,4.1) 39(1.75,4.1) 40(1.25,4.1) 41(0.75,4.1) 42(0.25,4.1) 43(-0.25,4.1) 44(-0.75,4.1) 45(-1.25,4.1) 46(-1.75,4.1) 47(-2.25,4.1) 48(-2.75,4.1)
  silkscreen extent -4.22,-2.9 2.9,3.58
0603 [mm] "Chip Capacitor; Body 1.6 x 0.8 mm (LxW typ)"
  rect 1.1x1 smd: 1(-0.85,0) 2(0.85,0)
  silkscreen extent -1.7,-0.4 -1.7,0.4
751-02 [mm] "Small Outline; 8 Leads; Body Width 3.9 mm; Pitch 1.27 mm"
  rect 0.6x2.2 smd: 1(-1.905,-2.6) 2(-0.635,-2.6) 3(0.635,-2.6) 4(1.905,-2.6) 5(1.905,2.6) 6(0.635,2.6) 7(-0.635,2.6) 8(-1.905,2.6)
  silkscreen extent -2.88,-2.72 2.5,1.1
751A-02 [mm] "Small Outline; 14 Leads; Body Width 3.9 mm; Pitch 1.27 mm"
  rect 0.6x2.2 smd: 1(-3.81,-2.625) 2(-2.54,-2.625) 3(-1.27,-2.625) 4(0,-2.625) 5(1.27,-2.625) 6(2.54,-2.625) 7(3.81,-2.625) 8(3.81,2.625) 9(2.54,2.625) 10(1.27,2.625) 11(0,2.625) 12(-1.27,2.625) 13(-2.54,2.625) 14(-3.81,2.625)
  silkscreen extent -4.78,-2.75 4.38,1.13
751A-03 [mm] "Small Outline; 14 Leads; Body Width 3.9 mm; Pitch 1.27 mm"
  rect 0.6x2.2 smd: 1(-3.81,-2.6) 2(-2.54,-2.6) 3(-1.27,-2.6) 4(0,-2.6) 5(1.27,-2.6) 6(2.54,-2.6) 7(3.81,-2.6) 8(3.81,2.6) 9(2.54,2.6) 10(1.27,2.6) 11(0,2.6) 12(-1.27,2.6) 13(-2.54,2.6) 14(-3.81,2.6)
  silkscreen extent -4.78,-2.72 4.38,1.1
1206 [mm] "Chip Capacitor; Body 3.2 x 1.6 mm (LxW typ)"
  rect 1.6x1.8 smd: 1(-1.4,0) 2(1.4,0)
  silkscreen extent -0.3,-0.8 0.3,0.8
1210 [mm] "Chip Capacitor; Body 3.2 x 2.5 mm (LxW typ)"
  rect 1.6x2.7 smd: 1(-1.4,0) 2(1.4,0)
  silkscreen extent -0.3,-1.25 0.3,1.25
53261-07 [mm]
  rect 0.8x2 smd: 1(-5,2) 2(-3.75,2) 3(-2.5,2) 4(-1.25,2) 5(0,2) 6(1.25,2) 7(2.5,2)
  rect 2.1x3 smd: 8(-7.55,-1.1) 9(5.05,-1.1)
  silkscreen extent -8.25,-3.6 5.75,3.02
787616 [mm] "Connector; USB1.1, Type A, Thru-Hole; 4 Position; Right Angle"
  rect 1.6x1.6 hole 0.9: 1(-12.99,-3.5)
  round 1.6 hole 0.9: 2(-12.99,-1) 3(-12.99,1) 4(-12.99,3.5)
  round 3.8 hole 2.3: 5(-10.28,6.57) 6(-10.28,-6.57)
  silkscreen extent -14.46,-7.25 0,7.25
787780 [mm] "Connector; USB1.1, Type B, Thru-Hole; 4 Position; Right Angle"
  rect 1.6x1.6 hole 0.9: 1(-1,1.25)
  round 1.6 hole 0.9: 2(-1,-1.25) 3(1,-1.25) 4(1,1.25)
  round 3.8 hole 2.3: 5(3.71,6.02) 6(3.71,-6.02)
  silkscreen extent -2.47,-6.02 13.99,6.02
1470168 [mm] "Connector; USB1.1, Type A, Thru-Hole; 4x4 Position; Right Angle"
  rect 1.6x1.6 hole 0.9: 1(-15.61,-3.5)
  round 1.6 hole 0.9: 2(-15.61,-1) 3(-15.61,1) 4(-15.61,3.5) 5(-12.99,-3.5) 6(-12.99,-1) 7(-12.99,1) 8(-12.99,3.5)
  round 3.8 hole 2.3: 9(-10.28,6.57) 10(-10.28,-6.57) 11(-15.96,6.57) 12(-15.96,-6.57)
  silkscreen extent -17.77,-7.6 0,7.6
BCY-W2/D3.1 [mm] "Crystal, Thru-Hole; 2 Leads; Body 3.1 x 8.2 mm (Dia.xH)"
  round 1.3 hole 0.75: 1(0,1.55) 2(0,-1.55)
  silkscreen extent -1.55,-1.19 1.55,1.17
BGA352x20 [mm] "352-Ball PBGA 1,27mm"
  round 0.635 smd paste-0.025: A1(0,0)
  round 0.635 smd: A2(1.27,0) A3(2.54,0) A4(3.81,0) A5(5.08,0) A6(6.35,0) A7(7.62,0) A8(8.89,0) A9(10.16,0) A10(11.43,0) A11(12.7,0) A12(13.97,0) A13(15.24,0) A14(16.51,0) A15(17.78,0) A16(19.05,0) A17(20.32,0) A18(21.59,0) A19(22.86,0) A20(24.13,0) B1(0,-1.27) B2(1.27,-1.27) B3(2.54,-1.27) B4(3.81,-1.27) B5(5.08,-1.27) B6(6.35,-1.27) B7(7.62,-1.27) B8(8.89,-1.27) B9(10.16,-1.27) B10(11.43,-1.27) B11(12.7,-1.27) B12(13.97,-1.27) B13(15.24,-1.27) B14(16.51,-1.27) B15(17.78,-1.27) B16(19.05,-1.27) B17(20.32,-1.27) B18(21.59,-1.27) B19(22.86,-1.27) B20(24.13,-1.27) C1(0,-2.54) C2(1.27,-2.54) C3(2.54,-2.54) C4(3.81,-2.54) C5(5.08,-2.54) C6(6.35,-2.54) C7(7.62,-2.54) C8(8.89,-2.54) C9(10.16,-2.54) C10(11.43,-2.54) C11(12.7,-2.54) C12(13.97,-2.54) C13(15.24,-2.54) C14(16.51,-2.54) C15(17.78,-2.54) C16(19.05,-2.54) C17(20.32,-2.54) C18(21.59,-2.54) C19(22.86,-2.54) C20(24.13,-2.54) D1(0,-3.81) D2(1.27,-3.81) D3(2.54,-3.81) D4(3.81,-3.81) D5(5.08,-3.81) D6(6.35,-3.81) D7(7.62,-3.81) D8(8.89,-3.81) D9(10.16,-3.81) D10(11.43,-3.81) D11(12.7,-3.81) D12(13.97,-3.81) D13(15.24,-3.81) D14(16.51,-3.81) D15(17.78,-3.81) D16(19.05,-3.81) D17(20.32,-3.81) D18(21.59,-3.81) D19(22.86,-3.81) D20(24.13,-3.81) E1(0,-5.08) E2(1.27,-5.08) E3(2.54,-5.08) E4(3.81,-5.08) E5(5.08,-5.08) E6(6.35,-5.08) E7(7.62,-5.08) E8(8.89,-5.08) E9(10.16,-5.08) E10(11.43,-5.08) E11(12.7,-5.08) E12(13.97,-5.08) E13(15.24,-5.08) E14(16.51,-5.08) E15(17.78,-5.08) E16(19.05,-5.08) E17(20.32,-5.08) E18(21.59,-5.08) E19(22.86,-5.08) E20(24.13,-5.08) F1(0,-6.35) F2(1.27,-6.35) F3(2.54,-6.35) F4(3.81,-6.35) F5(5.08,-6.35) F6(6.35,-6.35) F7(7.62,-6.35) F14(16.51,-6.35) F15(17.78,-6.35) F16(19.05,-6.35) F17(20.32,-6.35) F18(21.59,-6.35) F19(22.86,-6.35) F20(24.13,-6.35) G1(0,-7.62) G2(1.27,-7.62) G3(2.54,-7.62) G4(3.81,-7.62) G5(5.08,-7.62) G6(6.35,-7.62) G15(17.78,-7.62) G16(19.05,-7.62) G17(20.32,-7.62) G18(21.59,-7.62) G19(22.86,-7.62) G20(24.13,-7.62) H1(0,-8.89) H2(1.27,-8.89) H3(2.54,-8.89) H4(3.81,-8.89) H5(5.08,-8.89) H8(8.89,-8.89) H9(10.16,-8.89) H10(11.43,-8.89) H11(12.7,-8.89) H12(13.97,-8.89) H13(15.24,-8.89) H16(19.05,-8.89) H17(20.32,-8.89) H18(21.59,-8.89) H19(22.86,-8.89) H20(24.13,-8.89) J1(0,-10.16) J2(1.27,-10.16) J3(2.54,-10.16) J4(3.81,-10.16) J5(5.08,-10.16) J8(8.89,-10.16) J9(10.16,-10.16) J10(11.43,-10.16) J11(12.7,-10.16) J12(13.97,-10.16) J13(15.24,-10.16) J16(19.05,-10.16) J17(20.32,-10.16) J18(21.59,-10.16) J19(22.86,-10.16) J20(24.13,-10.16) K1(0,-11.43) K2(1.27,-11.43) K3(2.54,-11.43) K4(3.81,-11.43) K5(5.08,-11.43) K8(8.89,-11.43) K9(10.16,-11.43) K10(11.43,-11.43) K11(12.7,-11.43) K12(13.97,-11.43) K13(15.24,-11.43) K16(19.05,-11.43) K17(20.32,-11.43) K18(21.59,-11.43) K19(22.86,-11.43) K20(24.13,-11.43) L1(0,-12.7) L2(1.27,-12.7) L3(2.54,-12.7) L4(3.81,-12.7) L5(5.08,-12.7) L8(8.89,-12.7) L9(10.16,-12.7) L10(11.43,-12.7) L11(12.7,-12.7) L12(13.97,-12.7) L13(15.24,-12.7) L16(19.05,-12.7) L17(20.32,-12.7) L18(21.59,-12.7) L19(22.86,-12.7) L20(24.13,-12.7) M1(0,-13.97) M2(1.27,-13.97) M3(2.54,-13.97) M4(3.81,-13.97) M5(5.08,-13.97) M8(8.89,-13.97) M9(10.16,-13.97) M10(11.43,-13.97) M11(12.7,-13.97) M12(13.97,-13.97) M13(15.24,-13.97) M16(19.05,-13.97) M17(20.32,-13.97) M18(21.59,-13.97) M19(22.86,-13.97) M20(24.13,-13.97) N1(0,-15.24) N2(1.27,-15.24) N3(2.54,-15.24) N4(3.81,-15.24) N5(5.08,-15.24) N6(6.35,-15.24) N8(8.89,-15.24) N9(10.16,-15.24) N10(11.43,-15.24) N11(12.7,-15.24) N12(13.97,-15.24) N13(15.24,-15.24) N15(17.78,-15.24) N16(19.05,-15.24) N17(20.32,-15.24) N18(21.59,-15.24) N19(22.86,-15.24) N20(24.13,-15.24) P1(0,-16.51) P2(1.27,-16.51) P3(2.54,-16.51) P4(3.81,-16.51) P5(5.08,-16.51) P6(6.35,-16.51) P15(17.78,-16.51) P16(19.05,-16.51) P17(20.32,-16.51) P18(21.59,-16.51) P19(22.86,-16.51) P20(24.13,-16.51) R1(0,-17.78) R2(1.27,-17.78) R3(2.54,-17.78) R4(3.81,-17.78) R5(5.08,-17.78) R6(6.35,-17.78) R7(7.62,-17.78) R8(8.89,-17.78) R13(15.24,-17.78) R14(16.51,-17.78) R15(17.78,-17.78) R16(19.05,-17.78) R17(20.32,-17.78) R18(21.59,-17.78) R19(22.86,-17.78) R20(24.13,-17.78) T1(0,-19.05) T2(1.27,-19.05) T3(2.54,-19.05) T4(3.81,-19.05) T5(5.08,-19.05) T6(6.35,-19.05) T7(7.62,-19.05) T8(8.89,-19.05) T9(10.16,-19.05) T10(11.43,-19.05) T11(12.7,-19.05) T12(13.97,-19.05) T13(15.24,-19.05) T14(16.51,-19.05) T15(17.78,-19.05) T16(19.05,-19.05) T17(20.32,-19.05) T18(21.59,-19.05) T19(22.86,-19.05) T20(24.13,-19.05) U1(0,-20.32) U2(1.27,-20.32) U3(2.54,-20.32) U4(3.81,-20.32) U5(5.08,-20.32) U6(6.35,-20.32) U7(7.62,-20.32) U8(8.89,-20.32) U9(10.16,-20.32) U10(11.43,-20.32) U11(12.7,-20.32) U12(13.97,-20.32) U13(15.24,-20.32) U14(16.51,-20.32) U15(17.78,-20.32) U16(19.05,-20.32) U17(20.32,-20.32) U18(21.59,-20.32) U19(22.86,-20.32) U20(24.13,-20.32) V1(0,-21.59) V2(1.27,-21.59) V3(2.54,-21.59) V4(3.81,-21.59) V5(5.08,-21.59) V6(6.35,-21.59) V7(7.62,-21.59) V8(8.89,-21.59) V9(10.16,-21.59) V10(11.43,-21.59) V11(12.7,-21.59) V12(13.97,-21.59) V13(15.24,-21.59) V14(16.51,-21.59) V15(17.78,-21.59) V16(19.05,-21.59) V17(20.32,-21.59) V18(21.59,-21.59) V19(22.86,-21.59) V20(24.13,-21.59) W1(0,-22.86) W2(1.27,-22.86) W3(2.54,-22.86) W4(3.81,-22.86) W5(5.08,-22.86) W6(6.35,-22.86) W7(7.62,-22.86) W8(8.89,-22.86) W9(10.16,-22.86) W10(11.43,-22.86) W11(12.7,-22.86) W12(13.97,-22.86) W13(15.24,-22.86) W14(16.51,-22.86) W15(17.78,-22.86) W16(19.05,-22.86) W17(20.32,-22.86) W18(21.59,-22.86) W19(22.86,-22.86) W20(24.13,-22.86) Y1(0,-24.13) Y2(1.27,-24.13) Y3(2.54,-24.13) Y4(3.81,-24.13) Y5(5.08,-24.13) Y6(6.35,-24.13) Y7(7.62,-24.13) Y8(8.89,-24.13) Y9(10.16,-24.13) Y10(11.43,-24.13) Y11(12.7,-24.13) Y12(13.97,-24.13) Y13(15.24,-24.13) Y14(16.51,-24.13) Y15(17.78,-24.13) Y16(19.05,-24.13) Y17(20.32,-24.13) Y18(21.59,-24.13) Y19(22.86,-24.13) Y20(24.13,-24.13)
  silkscreen extent -1.27,-25.4 25.4,1.27
CAPPR1.5-4x5 [mm] "Capacitor, Electrolytic, Radial; Body 4 x 5 mm (Dia.xH typ); Pin Spacing 1.5 mm (typ)"
  rect 1.25x1.25 hole 0.75: 1(-0.75,0)
  round 1.25 hole 0.75: 2(0.75,0)
  silkscreen extent -2,-2 2,2
CAY16-J4 [mm]
  rect 1x0.45 smd: 1(0,0) 2(0,-0.8) 3(0,-1.6) 4(0,-2.4) 5(1.7,-2.4) 6(1.7,-1.6) 7(1.7,-0.8) 8(1.7,0)
  silkscreen extent -0.78,-2.93 2.48,0.53
CC1608-0603 [mm] "Chip Capacitor; Body 1.6 x 0.8 mm (LxW typ)"
  rect 1.1x1 smd: 1(-0.85,0) 2(0.85,0)
  silkscreen extent -1.7,-0.4 -1.7,0.4
CC2012-0805 [mm] "Chip Capacitor; Body 2.0 x 1.2 mm (LxW typ)"
  rect 1.3x1.5 smd: 1(-0.95,0) 2(0.95,0)
  silkscreen extent -1.9,-0.65 -1.9,0.65
CC5664-2225 [mm] "Chip Capacitor; Body 5.6 x 6.4 mm (LxW typ)"
  rect 1.9x6.8 smd: 1(-2.55,0) 2(2.55,0)
  silkscreen extent -1.3,-3.3 1.3,3.3
CD4532-1812 [mm] "Chip Diode; Body 4.5 x 3.2 mm (LxW typ)"
  rect 1.9x3.4 smd: 1(-1.95,0) 2(1.95,0)
  silkscreen extent -0.7,-1.6 0.7,1.6
CDRH127 [mm]
  rect 5.4x2.9 smd: 1(0,-9.9) 2(0,0)
  silkscreen extent -6.2,-11.1 6.2,1.2
Conn_25_smt [mm]
  rect 0.3x1.3 smd: 1(0,0) 2(0.5,0) 3(1,0) 4(1.5,0) 5(2,0) 6(2.5,0) 7(3,0) 8(3.5,0) 9(4,0) 10(4.5,0) 11(5,0) 12(5.5,0) 13(6,0) 14(6.5,0) 15(7,0) 16(7.5,0) 17(8,0) 18(8.5,0) 19(9,0) 20(9.5,0) 21(10,0) 22(10.5,0) 23(11,0) 24(11.5,0) 25(12,0)
  rect 1.8x2.2 smd: 26(-1.9,-3.25) 27(13.836,-3.123)
  silkscreen extent -1.8,-6.2 13.74,0.12
CR1608-0603 [mm] "Chip Resistor; Body 1.6 x 0.8 mm (LxW typ)"
  rect 1.1x1 smd: 1(-0.85,0) 2(0.85,0)
CR2032 [mm]
  round 2.5 hole 1.5: +(15,2.5) -(-5,2.5)
  silkscreen extent -7.45,-9 17.74,14
CSM-7 [mm] "Quartz Crystal, SM; 2 Leads; Body 11.4 x 4.8 x 5 mm (LxWxH)"
  rect 4.5x1.5 smd: 1(-4.25,0) 2(4.25,0)
  silkscreen extent -5.75,-2.5 5.75,2.5
DA15F [mil]
  rect 60x60 hole 39.37: 1(100,200)
  round 60 hole 39.37: 2(10,200) 3(-80,200) 4(-170,200) 5(-260,200) 6(145,100) 7(55,100) 8(-35,100) 9(-125,100) 10(-215,100) 11(100,0) 12(10,0) 13(-80,0) 14(-170,0) 15(-260,0)
  rect 250x250 hole 125.98: 16(422,100) 17(-562,100)
  silkscreen extent -681,-350 541,271
DF9-41S-1V [mm]
  rect 0.6x1.5 smd: 1(10,-2.25) 2(9.5,2.25) 3(9,-2.25) 4(8.5,2.25) 5(8,-2.25) 6(7.5,2.25) 7(7,-2.25) 8(6.5,2.25) 9(6,-2.25) 10(5.5,2.25) 11(5,-2.25) 12(4.5,2.25) 13(4,-2.25) 14(3.5,2.25) 15(3,-2.25) 16(2.5,2.25) 17(2,-2.25) 18(1.5,2.25) 19(1,-2.25) 20(0.5,2.25) 21(0,-2.25) 22(-0.5,2.25) 23(-1,-2.25) 24(-1.5,2.25) 25(-2,-2.25) 26(-2.5,2.25) 27(-3,-2.25) 28(-3.5,2.25) 29(-4,-2.25) 30(-4.5,2.25) 31(-5,-2.25) 32(-5.5,2.25) 33(-6,-2.25) 34(-6.5,2.25) 35(-7,-2.25) 36(-7.5,2.25) 37(-8,-2.25) 38(-8.5,2.25) 39(-9,-2.25) 40(-9.5,2.25) 41(-10,-2.25)
  round 1.9 hole 1.5: 42(11.55,0) 43(-11.55,0)
  rect 1.3x3.4 smd: 42_1(12.85,0) 43_1(-12.85,0)
  silkscreen extent -12.15,-2.82 12.15,2.2
"DIODE SMC" [mil] "Magnetic-Core Inductor with Winding Polarity Marking; 2 Leads"
  rect 110x150 smd: 1(-150,0) 2(150,0)
  silkscreen extent -130,-120 150,120
DJK-02A [mm]
  round 5.2 hole 3.2: 1(-10,0)
  round 4.7 hole 2.8: 2(-5.5,-3) 3(-10,-6)
  silkscreen extent -14.5,-10 -5.5,0
DSO-F2/D6.1 [mm] "SMT LED; 2 Flat Leads"
  rect 1.5x1.5 smd: 1(-1.75,0) 2(1.75,0)
  silkscreen extent -2.9,-1.15 3.2,1.15
DSUB1.385-2H9 [mm] "Connector; D Subminiature; 9 Position; Right Angle; Pitch 1.385 mm"
  rect 1.69x1.69 hole 1.1: 1(-5.54,-10.92)
  round 1.69 hole 1.1: 2(-2.77,-10.92) 3(0,-10.92) 4(2.77,-10.92) 5(5.54,-10.92) 6(-4.155,-8.08) 7(-1.385,-8.08) 8(1.385,-8.08) 9(4.155,-8.08)
  round 4.76 hole 3.2: 10(-12.495,-9.5) 11(12.495,-9.5)
  silkscreen extent -15.4,-12.4 15.4,6
F-QFP7x7-G48/X.3N [mm] "QFP; 48 Leads; Body 7 x 7 mm; Pitch 0.5 mm"
  rect 1.6x0.3 smd: 1(-4.1,2.75) 2(-4.1,2.25) 3(-4.1,1.75) 4(-4.1,1.25) 5(-4.1,0.75) 6(-4.1,0.25) 7(-4.1,-0.25) 8(-4.1,-0.75) 9(-4.1,-1.25) 10(-4.1,-1.75) 11(-4.1,-2.25) 12(-4.1,-2.75) 25(4.1,-2.75) 26(4.1,-2.25) 27(4.1,-1.75) 28(4.1,-1.25) 29(4.1,-0.75) 30(4.1,-0.25) 31(4.1,0.25) 32(4.1,0.75) 33(4.1,1.25) 34(4.1,1.75) 35(4.1,2.25) 36(4.1,2.75)
  rect 0.3x1.6 smd: 13(-2.75,-4.1) 14(-2.25,-4.1) 15(-1.75,-4.1) 16(-1.25,-4.1) 17(-0.75,-4.1) 18(-0.25,-4.1) 19(0.25,-4.1) 20(0.75,-4.1) 21(1.25,-4.1) 22(1.75,-4.1) 23(2.25,-4.1) 24(2.75,-4.1) 37(2.75,4.1) 38(2.25,4.1) 39(1.75,4.1) 40(1.25,4.1) 41(0.75,4.1) 42(0.25,4.1) 43(-0.25,4.1) 44(-0.75,4.1) 45(-1.25,4.1) 46(-1.75,4.1) 47(-2.25,4.1) 48(-2.75,4.1)
  silkscreen extent -4.22,-2.9 2.9,3.57
FH12-10(4)SA-1SH [mm] "Connector; FH12 Series; 4 Position; 1.0mm Spaced Bottom Eccentric Contact"
  rect 0.6x1.3 smd: 1(-1.75,1.625) 2(-0.75,1.625) 3(0.25,1.625) 4(1.25,1.625)
  rect 1.8x2.2 smd: 5(4.15,-1.625) 6(-4.15,-1.625)
  silkscreen extent -4.05,-4.63 4.05,1.75
FI-SE20P-HF [mm]
  rect 0.8x2.4 smd: 1(-794.5,-927.1) 2(-793.25,-927.1) 3(-792,-927.1) 4(-790.75,-927.1) 5(-789.5,-927.1) 6(-788.25,-927.1) 7(-787,-927.1) 8(-785.75,-927.1) 9(-784.5,-927.1) 10(-783.25,-927.1) 11(-782,-927.1) 12(-780.75,-927.1) 13(-779.5,-927.1) 14(-778.25,-927.1) 15(-777,-927.1) 16(-775.75,-927.1) 17(-774.5,-927.1) 18(-773.25,-927.1) 19(-772,-927.1) 20(-770.75,-927.1)
  rect 1.25x2.5 smd: 21(-798,-931.55) 22(-767.25,-931.55)
  silkscreen extent -798,-932.8 -767.25,-926.98
HC-49U [mm] "Quartz Crystal, Thru-Hole; 2 Leads; Body 11.35 x 4.65 x 13.46 mm (LxWxH max)"
  oct 1.5x1.5 hole 0.9: 1(-2.44,0)
  round 1.5 hole 0.9: 2(2.44,0)
  silkscreen extent -5.7,-2.35 5.7,2.35
HDR1X5 [mm] "Connector; Header; 5 Position"
  rect 1.5x1.5 hole 0.9: 1(0,0)
  round 1.5 hole 0.9: 2(2.54,0) 3(5.08,0) 4(7.62,0) 5(10.16,0)
  silkscreen extent -1.27,-1.27 11.43,1.27
HDR2X5 [mm] "Connector; Header; 5x2 Position"
  rect 1.5x1.5 hole 0.9: 1(0,0)
  round 1.5 hole 0.9: 2(0,2.54) 3(2.54,0) 4(2.54,2.54) 5(5.08,0) 6(5.08,2.54) 7(7.62,0) 8(7.62,2.54) 9(10.16,0) 10(10.16,2.54)
  silkscreen extent -1.27,-1.27 11.43,3.81
HDR2X10 [mm] "Connector; Header; 10x2 Position"
  rect 1.5x1.5 hole 0.9: 1(0,0)
  round 1.5 hole 0.9: 2(0,2.54) 3(2.54,0) 4(2.54,2.54) 5(5.08,0) 6(5.08,2.54) 7(7.62,0) 8(7.62,2.54) 9(10.16,0) 10(10.16,2.54) 11(12.7,0) 12(12.7,2.54) 13(15.24,0) 14(15.24,2.54) 15(17.78,0) 16(17.78,2.54) 17(20.32,0) 18(20.32,2.54) 19(22.86,0) 20(22.86,2.54)
  silkscreen extent -1.27,-1.27 24.13,3.81
HDR2X20 [mm] "Connector; Header; 20x2 Position"
  rect 1.5x1.5 hole 0.9: 1(0,0)
  round 1.5 hole 0.9: 2(0,2.54) 3(2.54,0) 4(2.54,2.54) 5(5.08,0) 6(5.08,2.54) 7(7.62,0) 8(7.62,2.54) 9(10.16,0) 10(10.16,2.54) 11(12.7,0) 12(12.7,2.54) 13(15.24,0) 14(15.24,2.54) 15(17.78,0) 16(17.78,2.54) 17(20.32,0) 18(20.32,2.54) 19(22.86,0) 20(22.86,2.54) 21(25.4,0) 22(25.4,2.54) 23(27.94,0) 24(27.94,2.54) 25(30.48,0) 26(30.48,2.54) 27(33.02,0) 28(33.02,2.54) 29(35.56,0) 30(35.56,2.54) 31(38.1,0) 32(38.1,2.54) 33(40.64,0) 34(40.64,2.54) 35(43.18,0) 36(43.18,2.54) 37(45.72,0) 38(45.72,2.54) 39(48.26,0) 40(48.26,2.54)
  silkscreen extent -1.27,-1.27 49.53,3.81
INDC2012-0805 [mm] "Chip Inductor; Body 2 x 1.2 mm (LxW typ)"
  rect 1x1.2 smd: 1(-1,0) 2(1,0)
  silkscreen extent -0.2,-0.5 0.2,0.5
INDC3216-1206 [mm] "3216 Chip; Chip Inductor; Body 3.2 x 1.6 mm (LxW typ)"
  rect 1.2x1.6 smd: 1(-1.5,0) 2(1.5,0)
  silkscreen extent -0.6,-0.7 0.6,0.7
INDC4532-1812 [mm] "Chip Inductor; Body 4.5 x 3.2 mm (LxW typ)"
  rect 1.5x3.2 smd: 1(-2.15,0) 2(2.15,0)
  silkscreen extent -1.1,-1.5 1.1,1.5
KCAK4R [mm]
  round 1.651 hole 1: 1(0,0) 2(1.25,2.5) 3(2.5,0) 4(3.75,2.5)
  silkscreen extent -2.5,-3.5 6.25,3.6
KX-12B [mm]
  rect 1.9x2.4 smd: 1(-7.2,1.25) 2(-2.7,1.25)
  silkscreen extent -7.95,-0.5 -1.95,3
KX-MC [mm]
  rect 4x2 smd: 1(-7.65,0) 2(1.75,0) 3(1.75,3.5) 4(-7.65,3.5)
  silkscreen extent -9.45,-0.85 3.6,4.35
LQFP64 [mm]
  rect 1.6x0.3 smd: 1(-6.35,3.85) 2(-6.35,3.35) 3(-6.35,2.85) 4(-6.35,2.35) 5(-6.35,1.85) 6(-6.35,1.35) 7(-6.35,0.85) 8(-6.35,0.35) 9(-6.35,-0.15) 10(-6.35,-0.65) 11(-6.35,-1.15) 12(-6.35,-1.65) 13(-6.35,-2.15) 14(-6.35,-2.65) 15(-6.35,-3.15) 16(-6.35,-3.65) 33(4.85,-3.65) 34(4.85,-3.15) 35(4.85,-2.65) 36(4.85,-2.15) 37(4.85,-1.65) 38(4.85,-1.15) 39(4.85,-0.65) 40(4.85,-0.15) 41(4.85,0.35) 42(4.85,0.85) 43(4.85,1.35) 44(4.85,1.85) 45(4.85,2.35) 46(4.85,2.85) 47(4.85,3.35) 48(4.85,3.85)
  rect 0.3x1.6 smd: 17(-4.5,-5.5) 18(-4,-5.5) 19(-3.5,-5.5) 20(-3,-5.5) 21(-2.5,-5.5) 22(-2,-5.5) 23(-1.5,-5.5) 24(-1,-5.5) 25(-0.5,-5.5) 26(0,-5.5) 27(0.5,-5.5) 28(1,-5.5) 29(1.5,-5.5) 30(2,-5.5) 31(2.5,-5.5) 32(3,-5.5) 49(3,5.7) 50(2.5,5.7) 51(2,5.7) 52(1.5,5.7) 53(1,5.7) 54(0.5,5.7) 55(0,5.7) 56(-0.5,5.7) 57(-1,5.7) 58(-1.5,5.7) 59(-2,5.7) 60(-2.5,5.7) 61(-3,5.7) 62(-3.5,5.7) 63(-4,5.7) 64(-4.5,5.7)
  silkscreen extent -6.47,-4.3 3.65,4.67
LU1T516-43 [mm]
  rect 1.5x1.5 hole 0.9: 1(-4.445,6.35)
  round 1.5 hole 0.9: 2(-3.175,8.89) 3(-1.905,6.35) 4(-0.635,8.89) 5(0.635,6.35) 6(1.905,8.89) 7(3.175,6.35) 8(4.445,8.89)
  round 1.651 hole 1: 9(-6.325,-5.08) 10(-3.785,-3.378) 11(3.785,-5.08) 12(6.325,-3.378)
  round 2.65 hole 1.5: 13(-7.747,3.048) 14(7.747,3.048)
  round 2.95 hole 3.2 unplated: MH3(-5.715,0) MH4(5.715,0)
  silkscreen extent -7.92,-8.18 7.92,10.21